# Altium PCB Copy of PCB1.PcbDoc (part 1 of 9)
Units mm, origin at the board's own origin, x right, y up, seen from the top; angles counter-clockwise.
Board outline 100 x 100 mm, 6 copper layers (Top Layer, Int1 (GND), Int2 (Sign), Int3 (Sign), Int4 (PWR), Bottom Layer), stack 1.538 mm thick; 614 components, 712 nets, 3013 pads, 501 vias.
Unrouted connection lines stored in the file: 259.
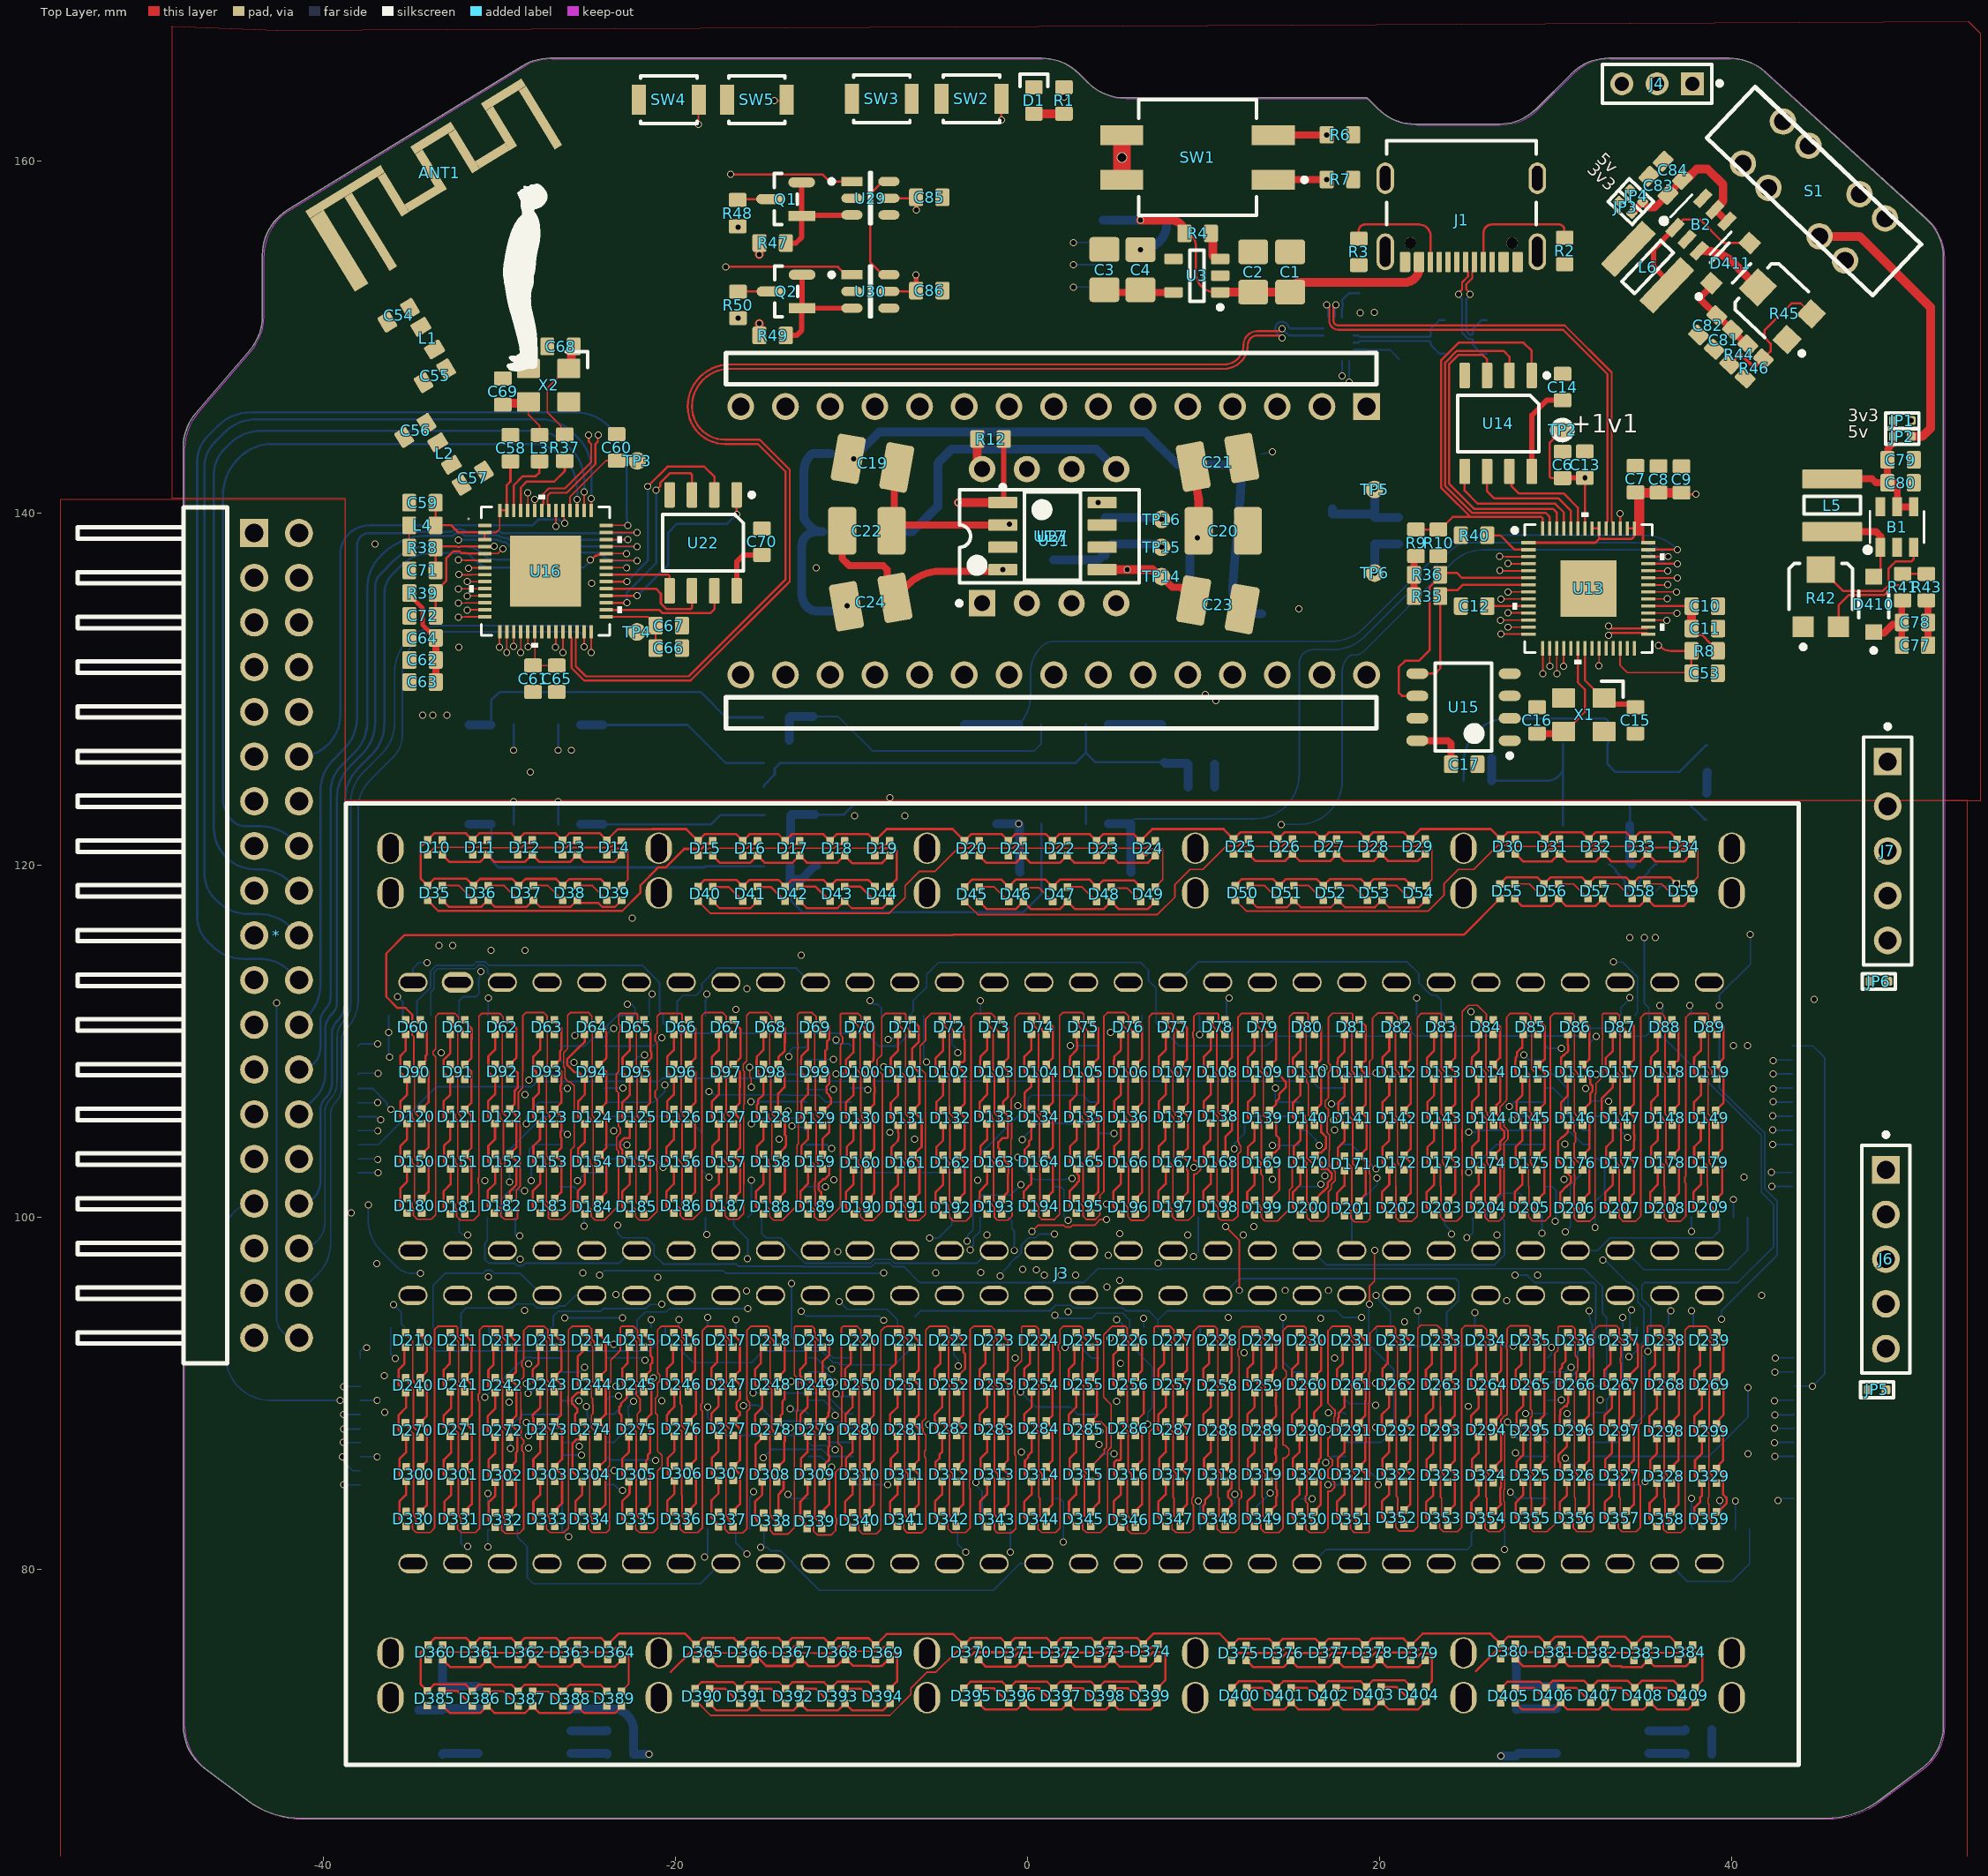
[diagram p0: Top Layer view]
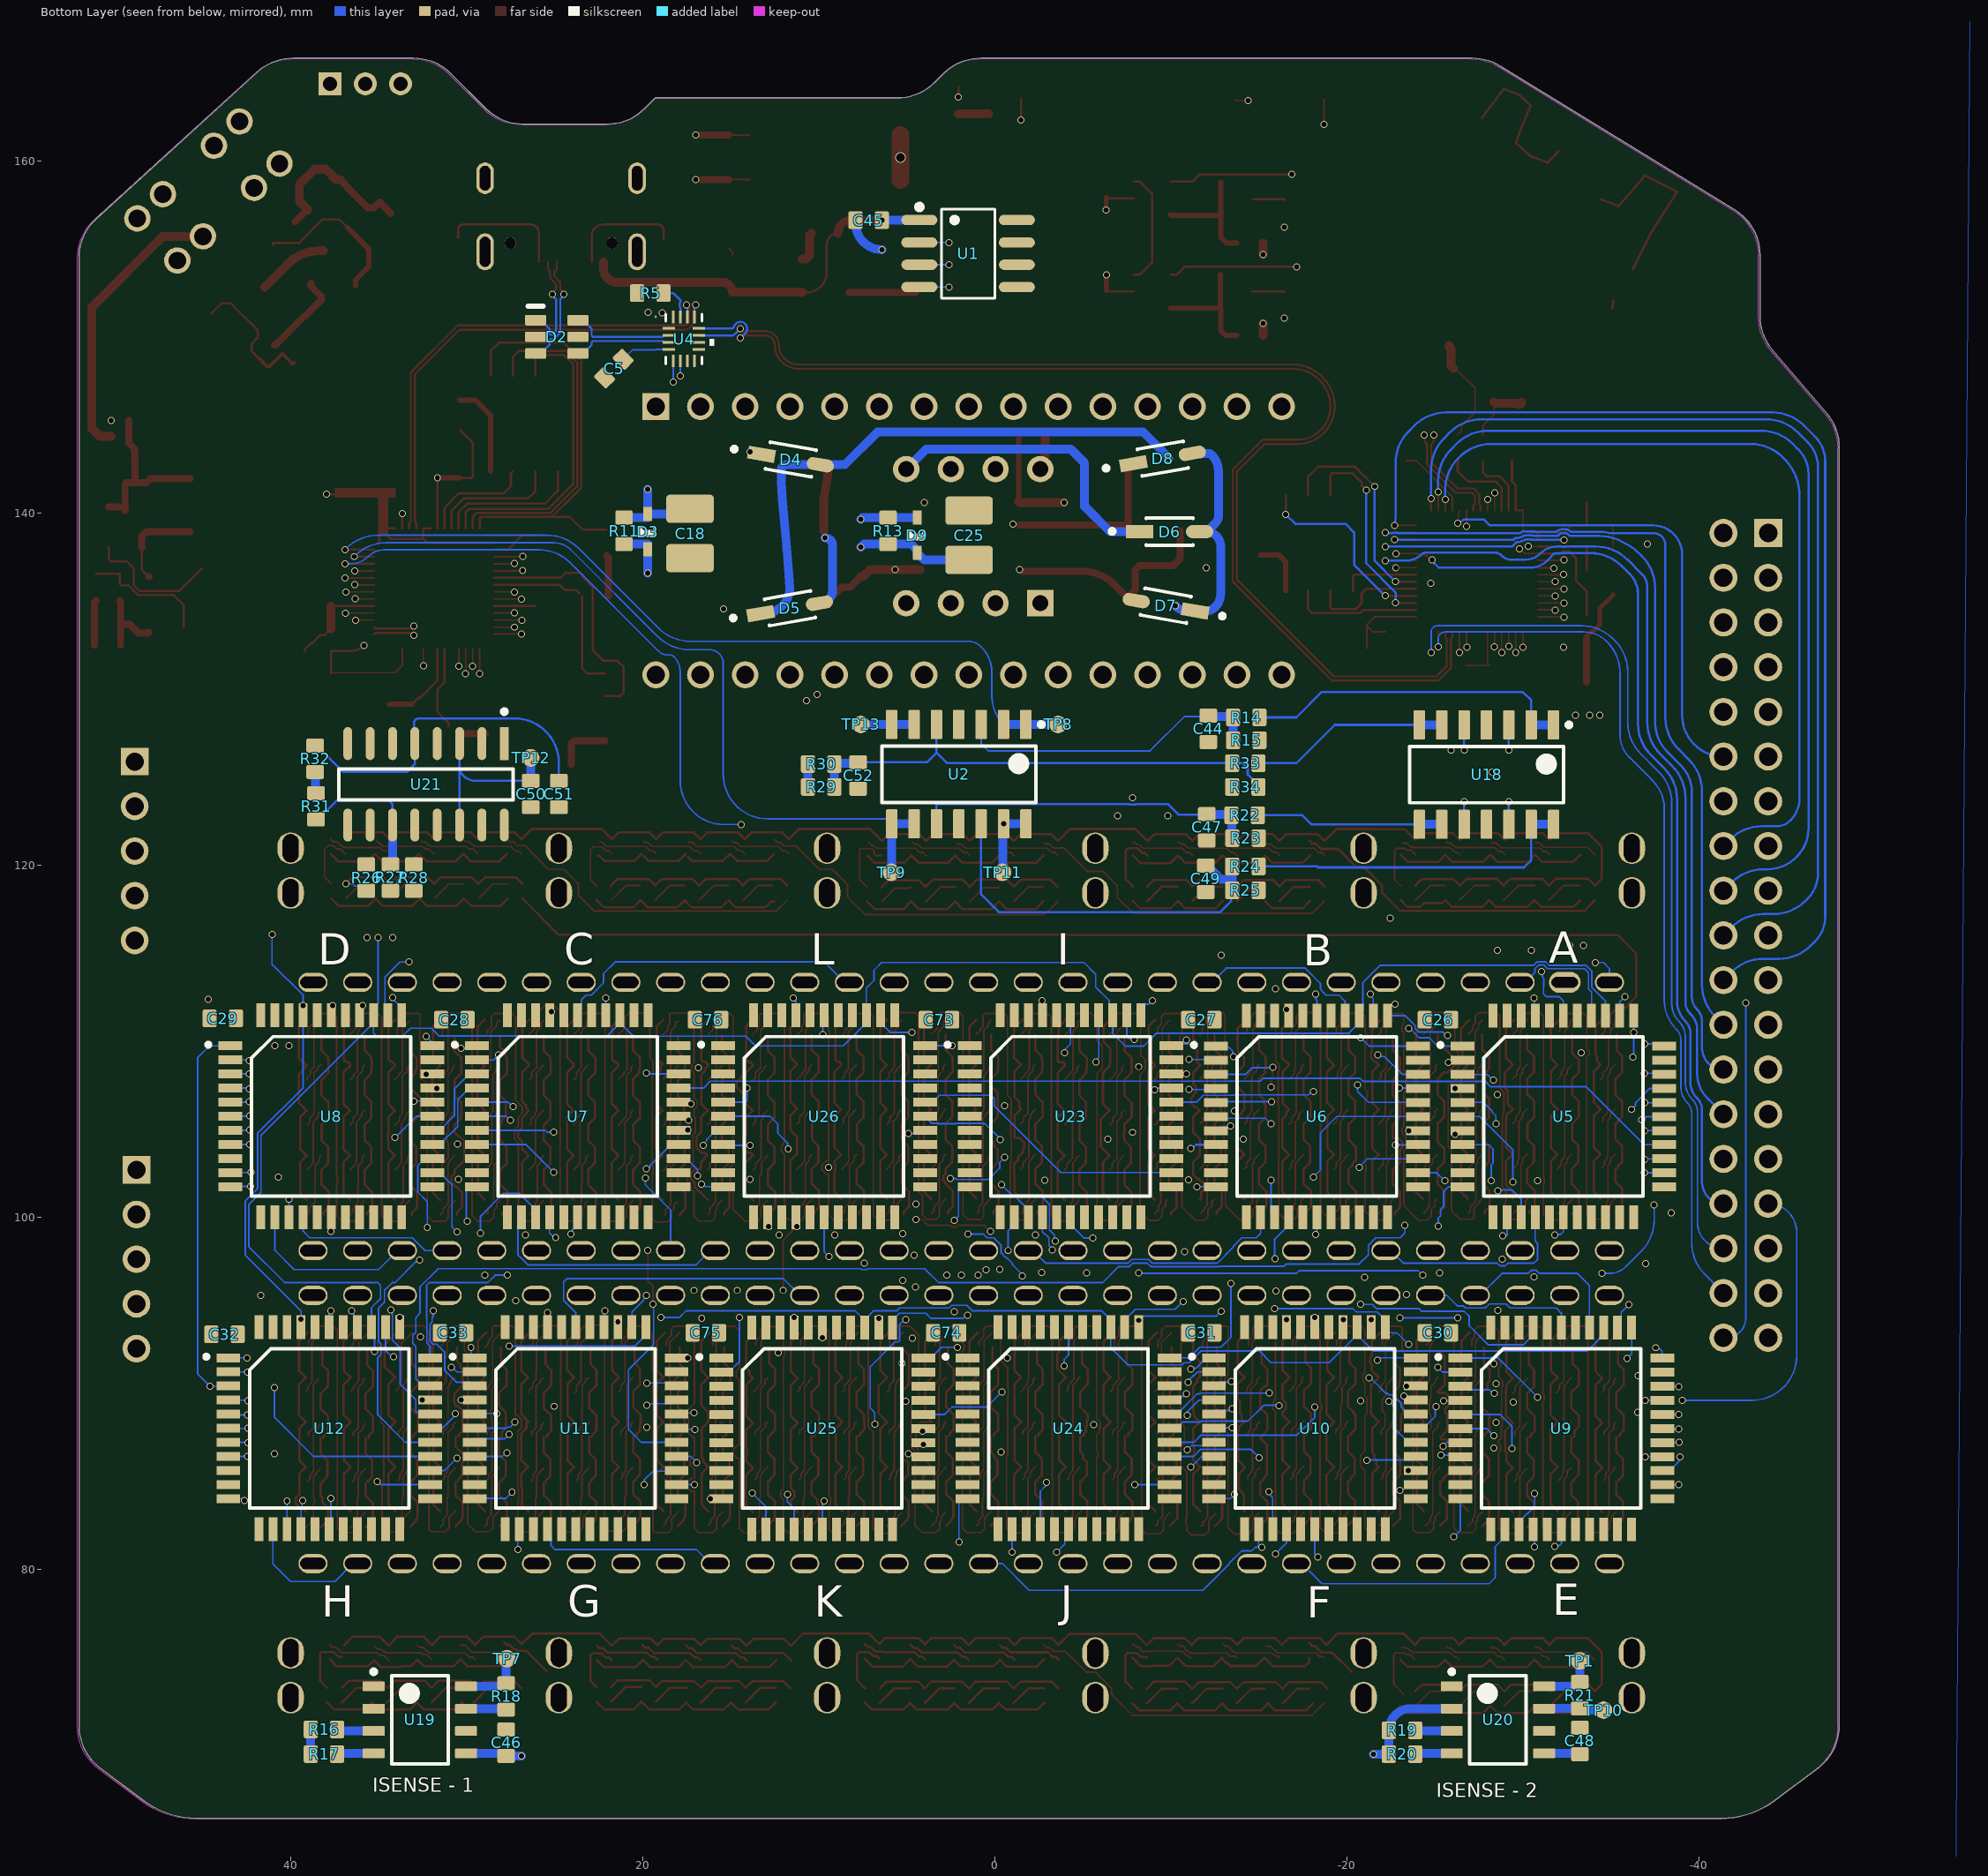
[diagram p1: Bottom Layer view, seen from below]
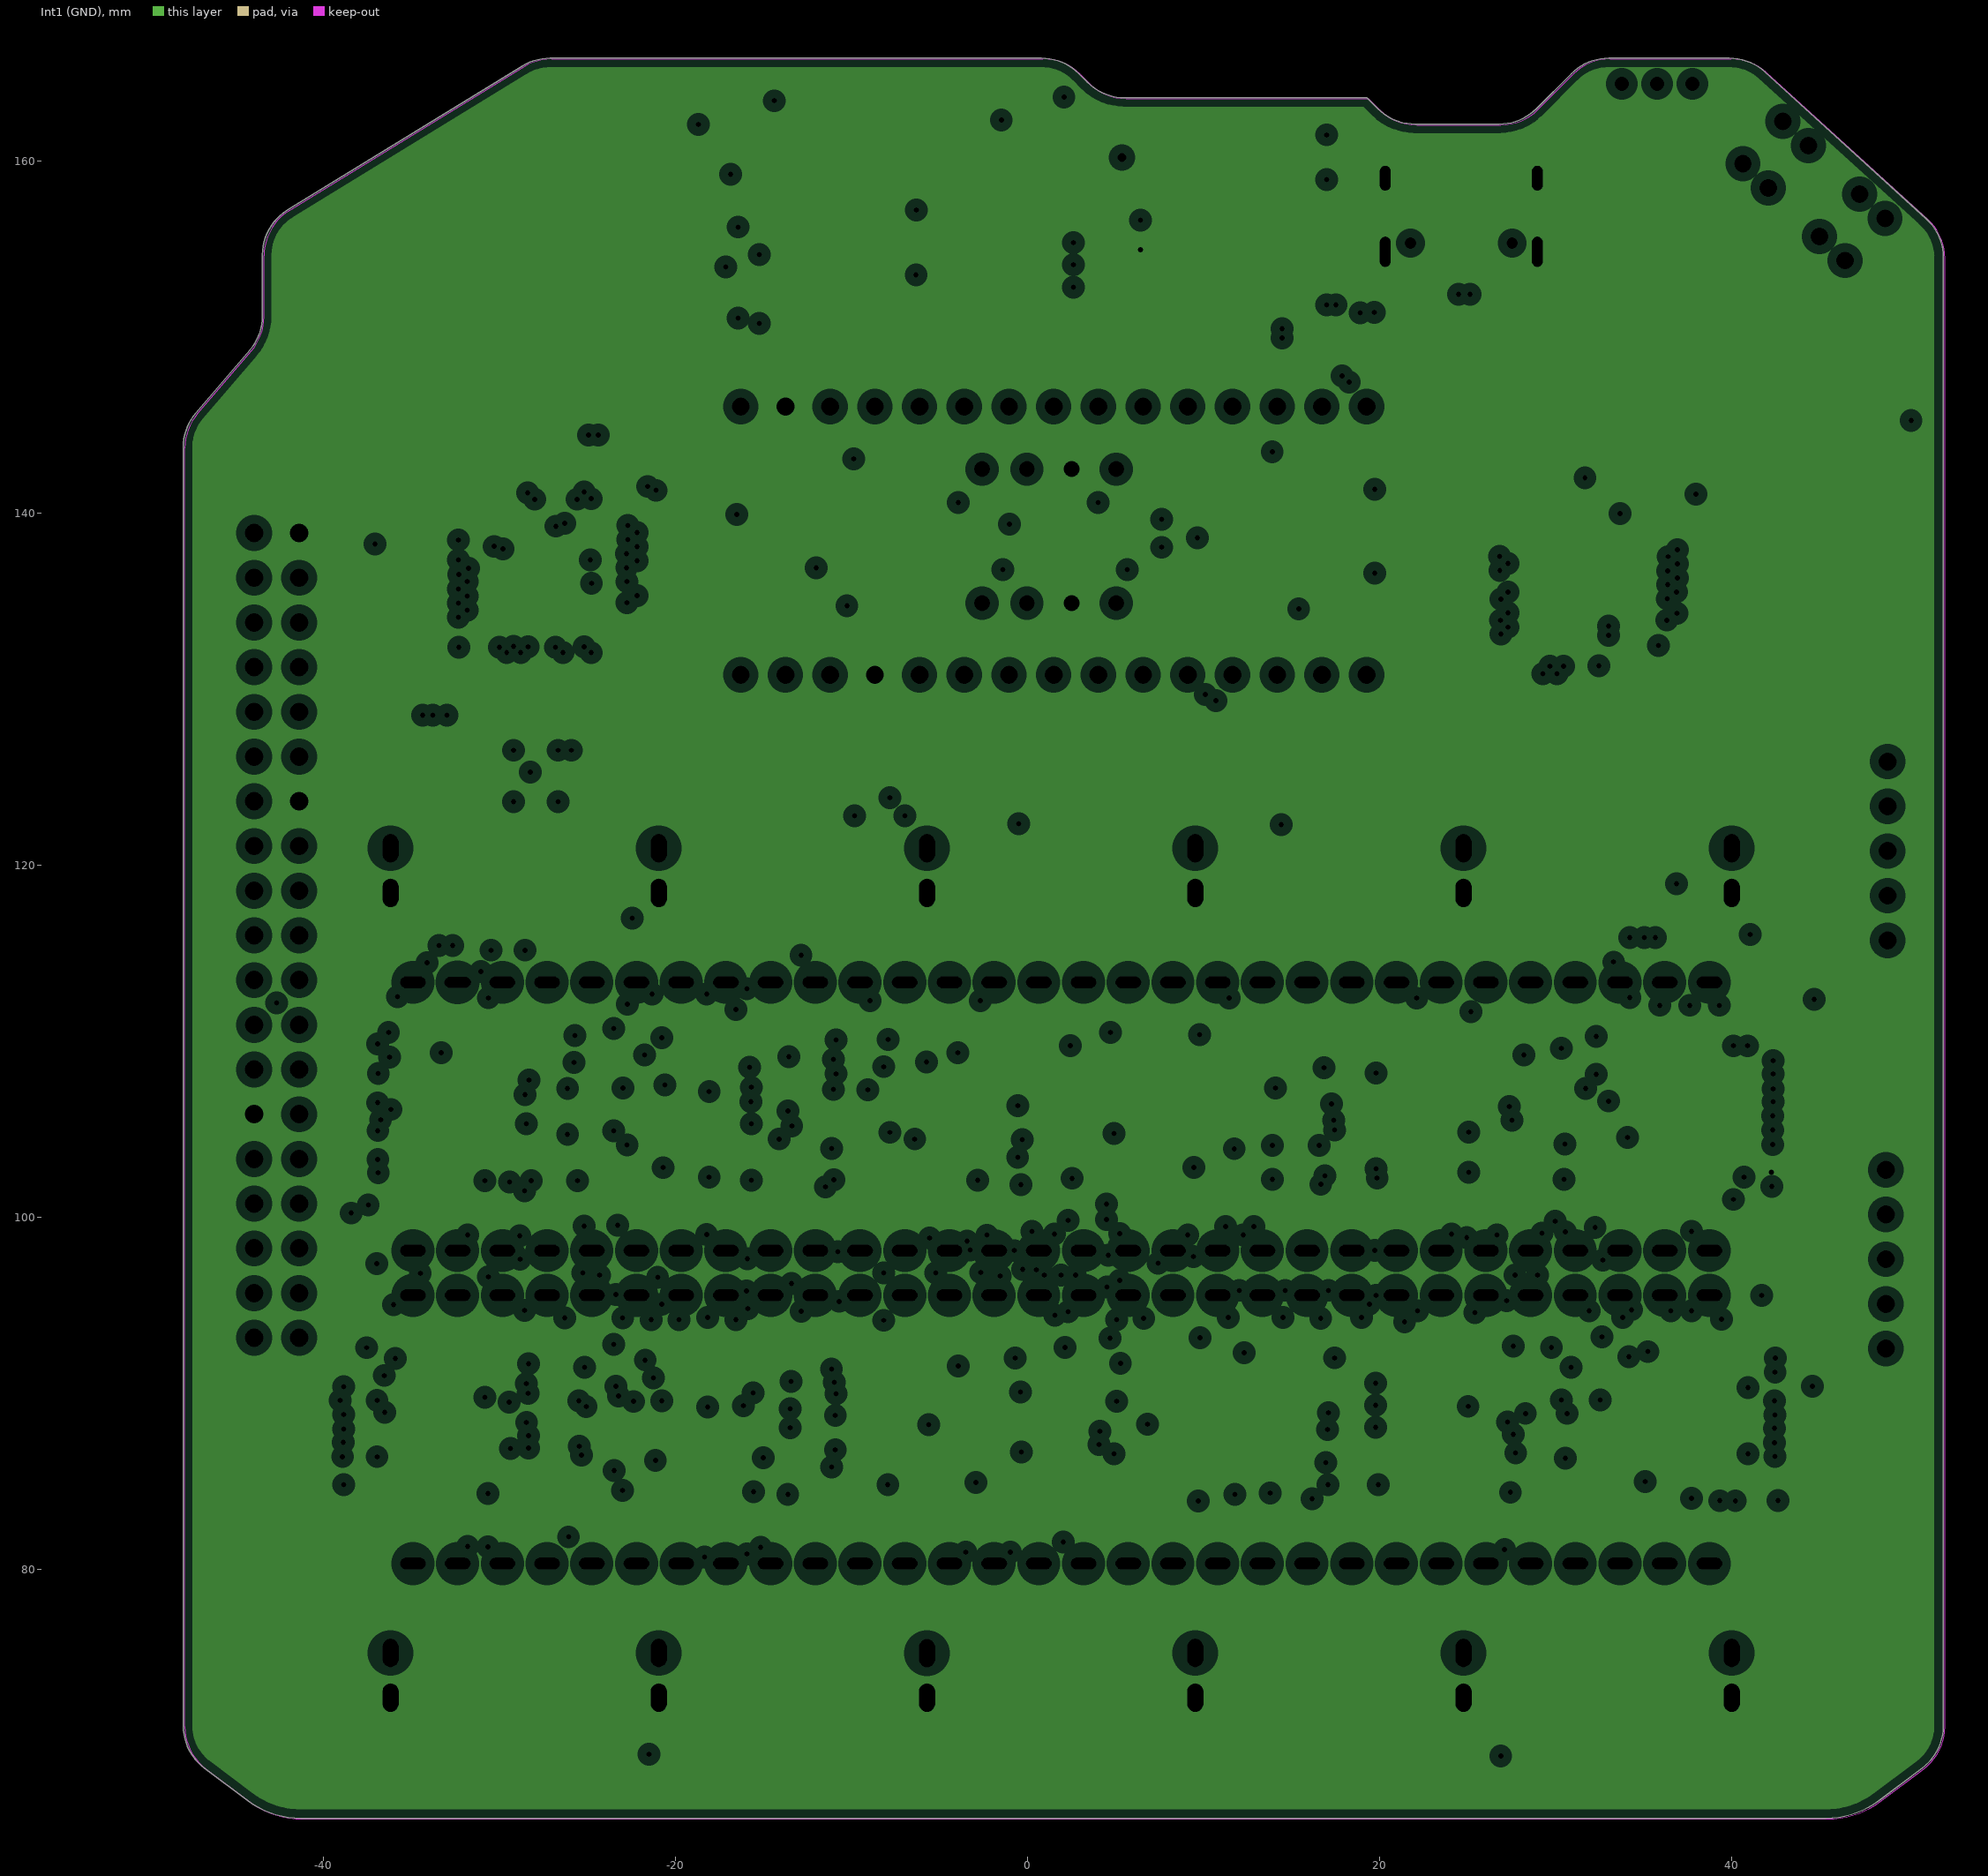
[diagram p2: Int1 (GND), clearances drawn from the general rule]
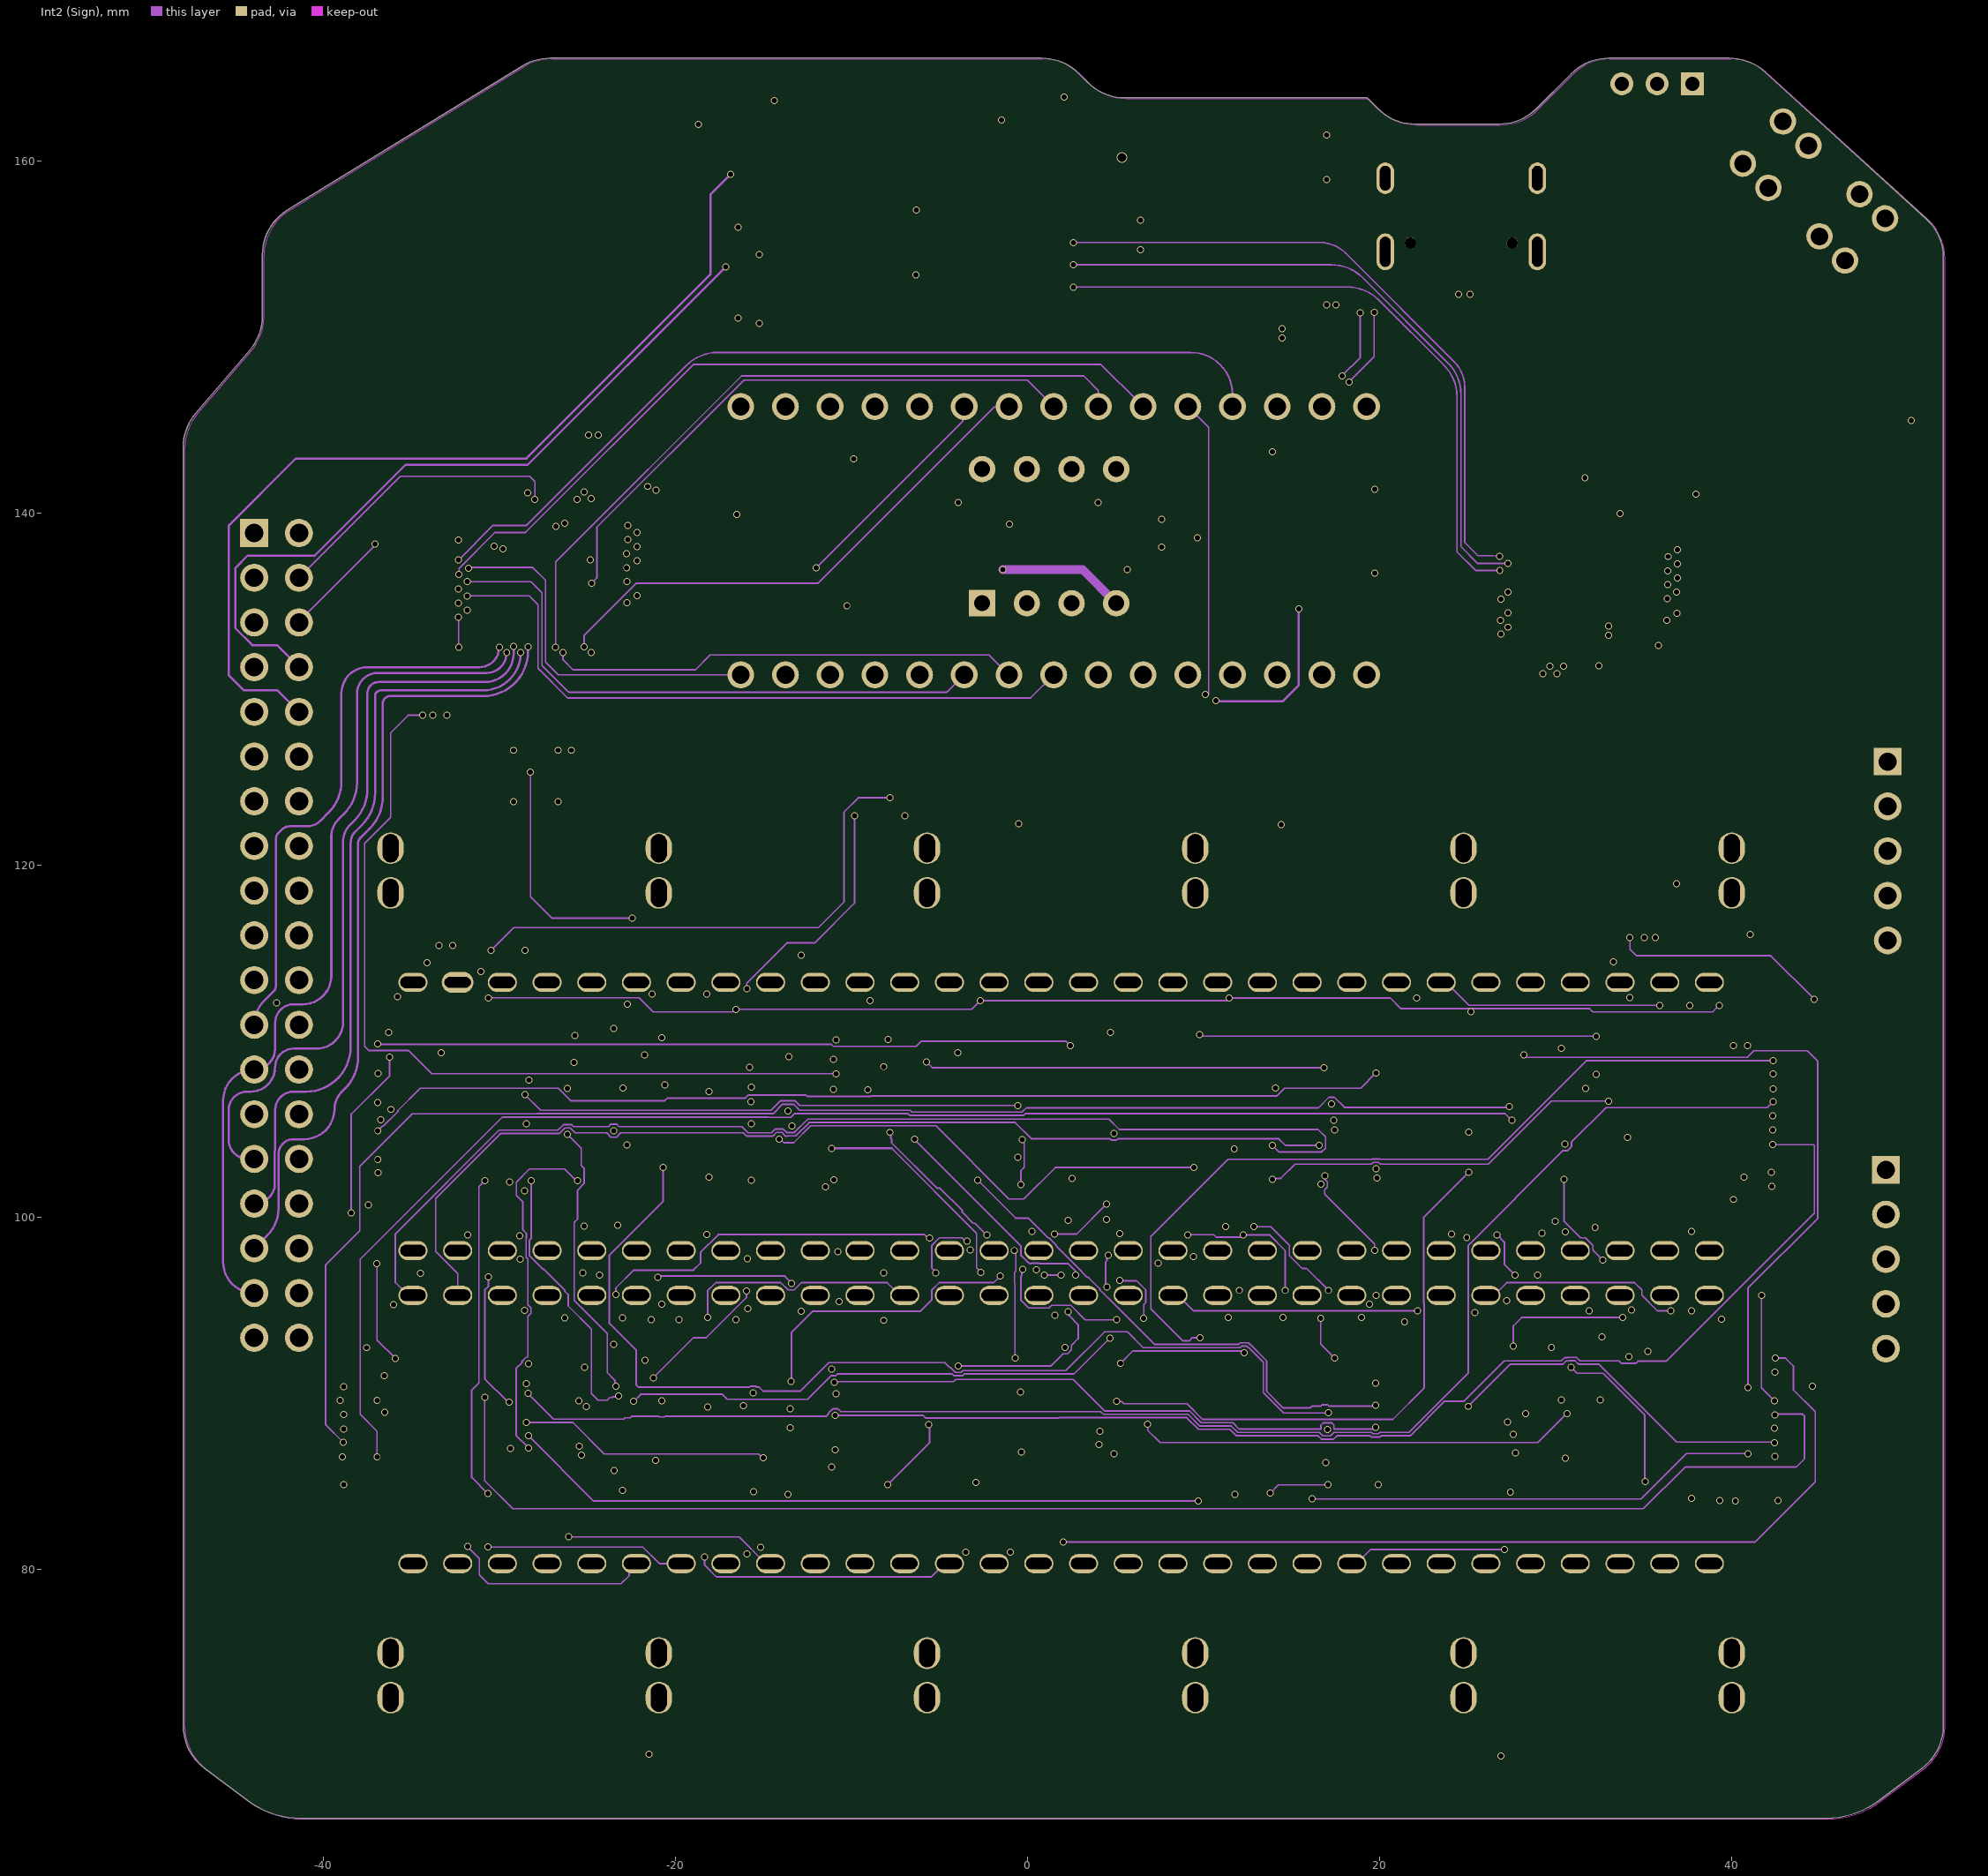
[diagram p3: Int2 (Sign)]
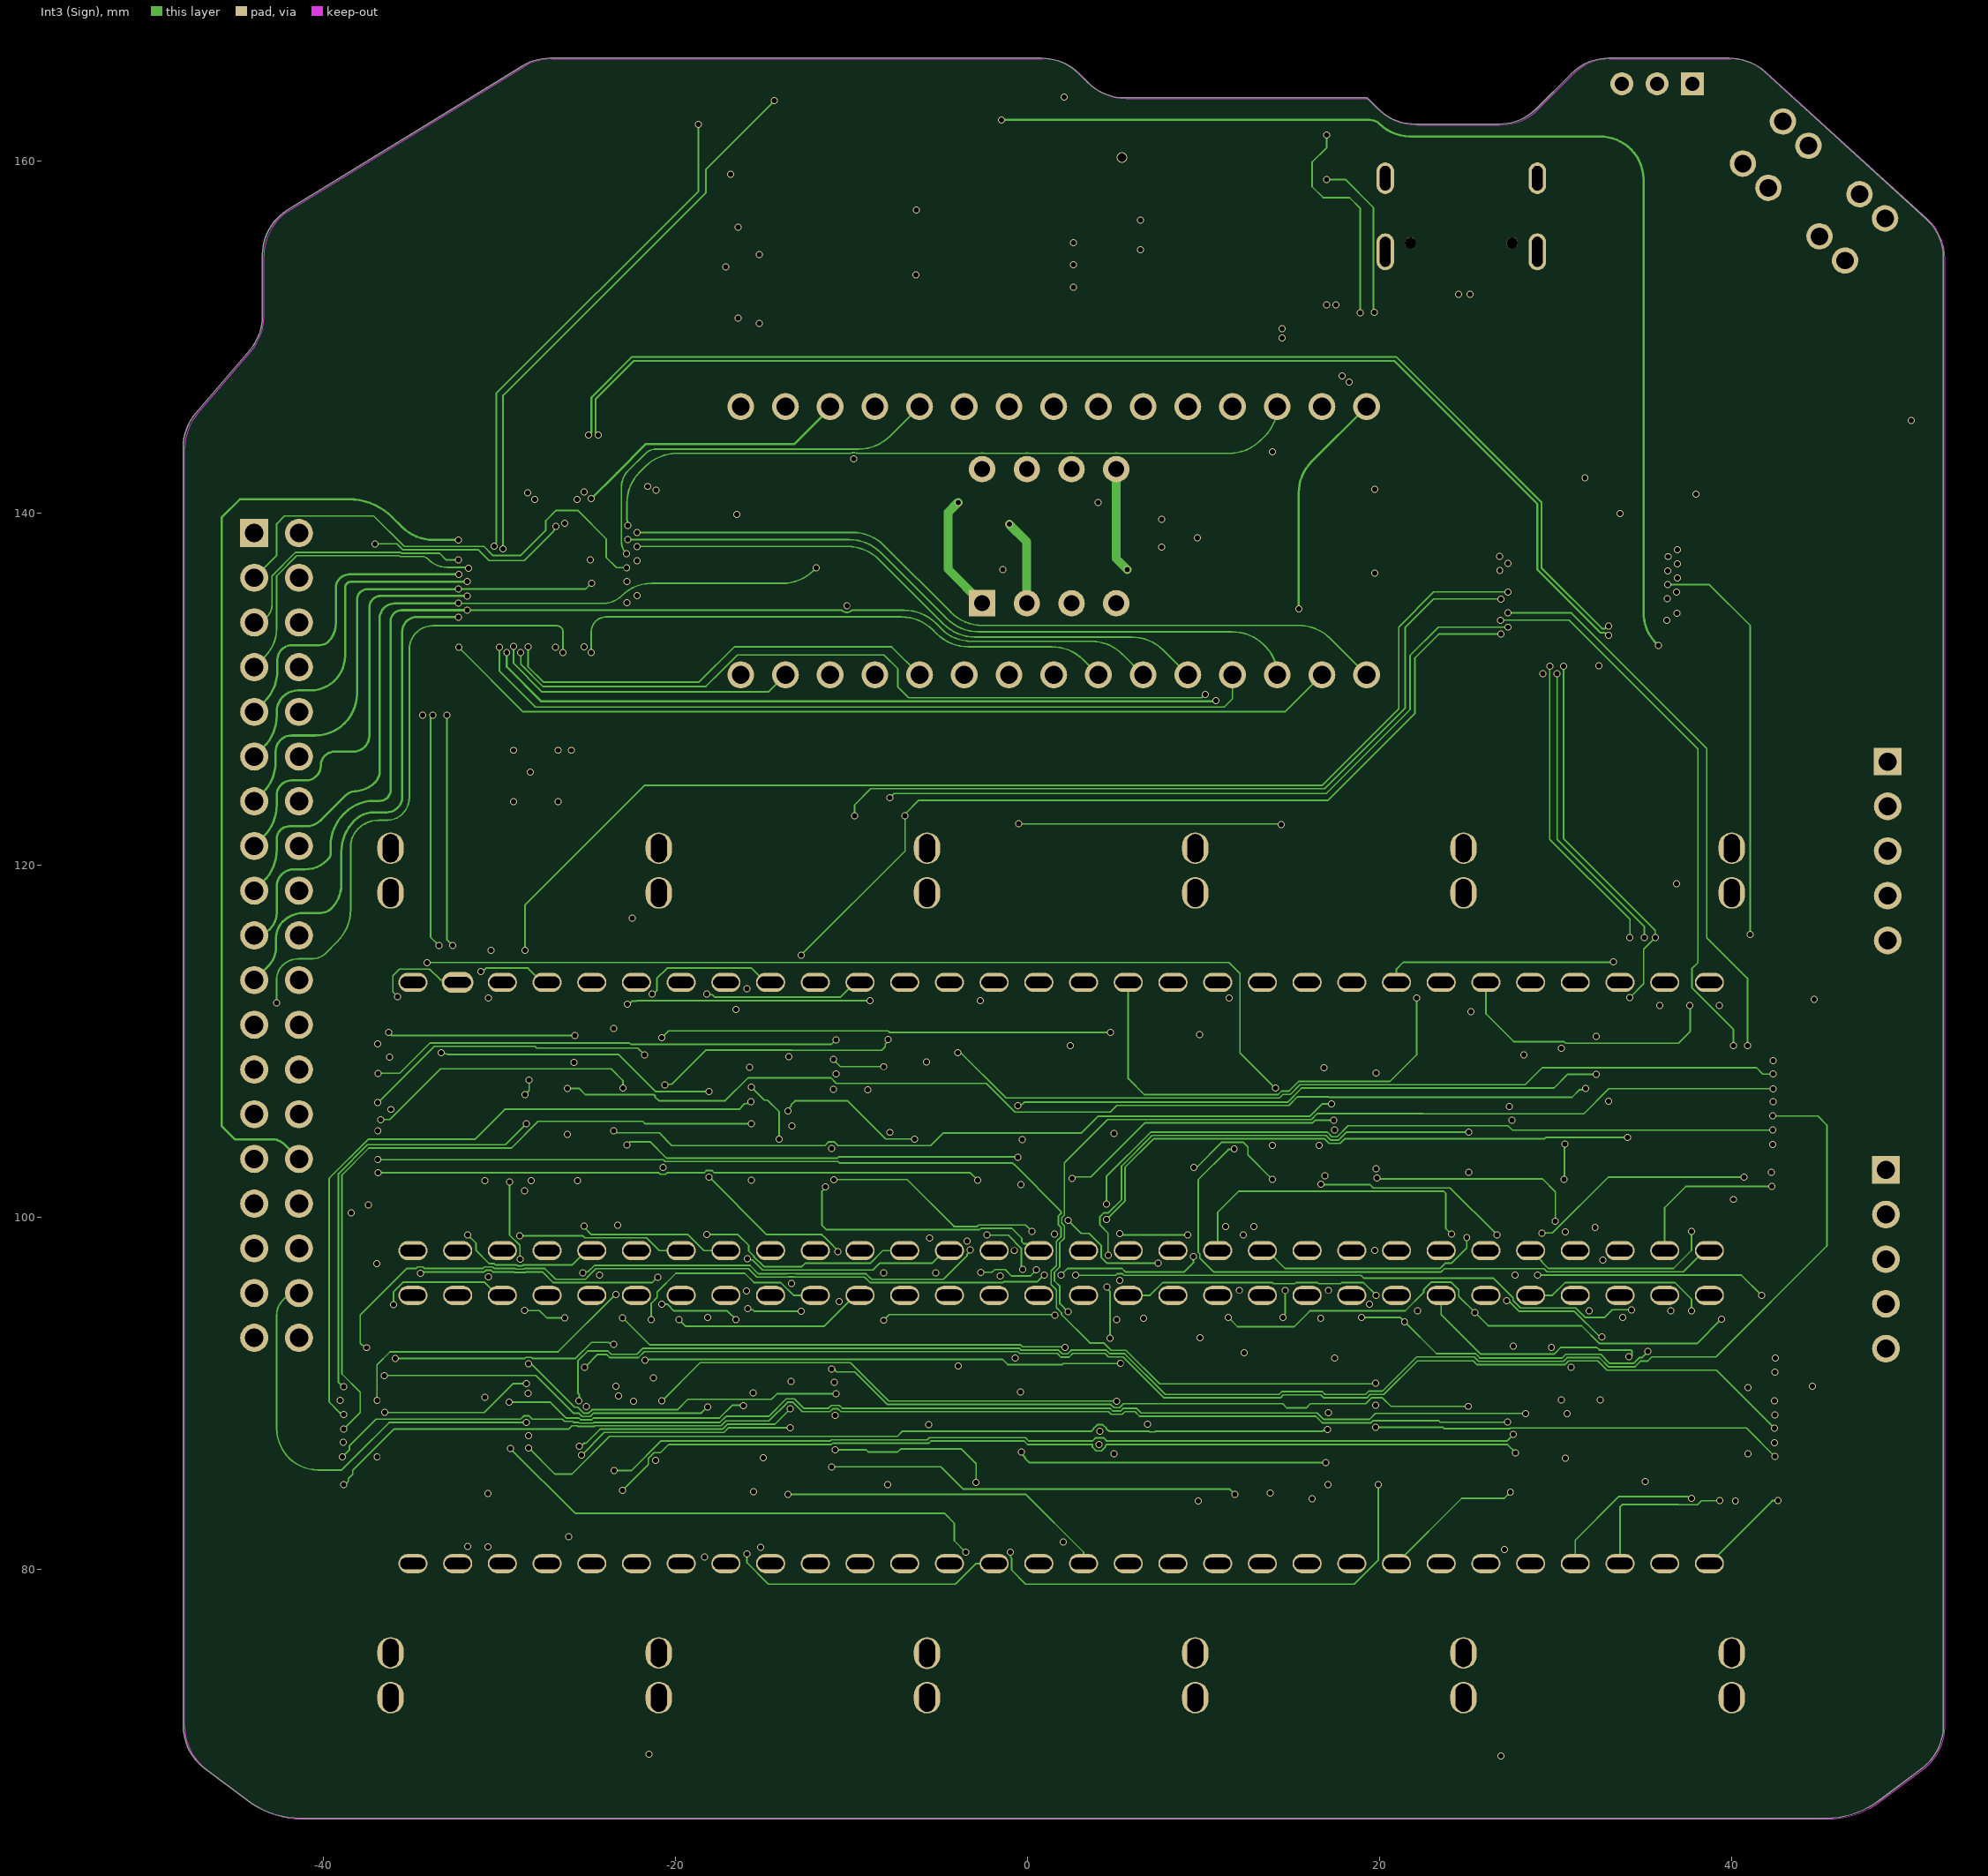
[diagram p4: Int3 (Sign)]
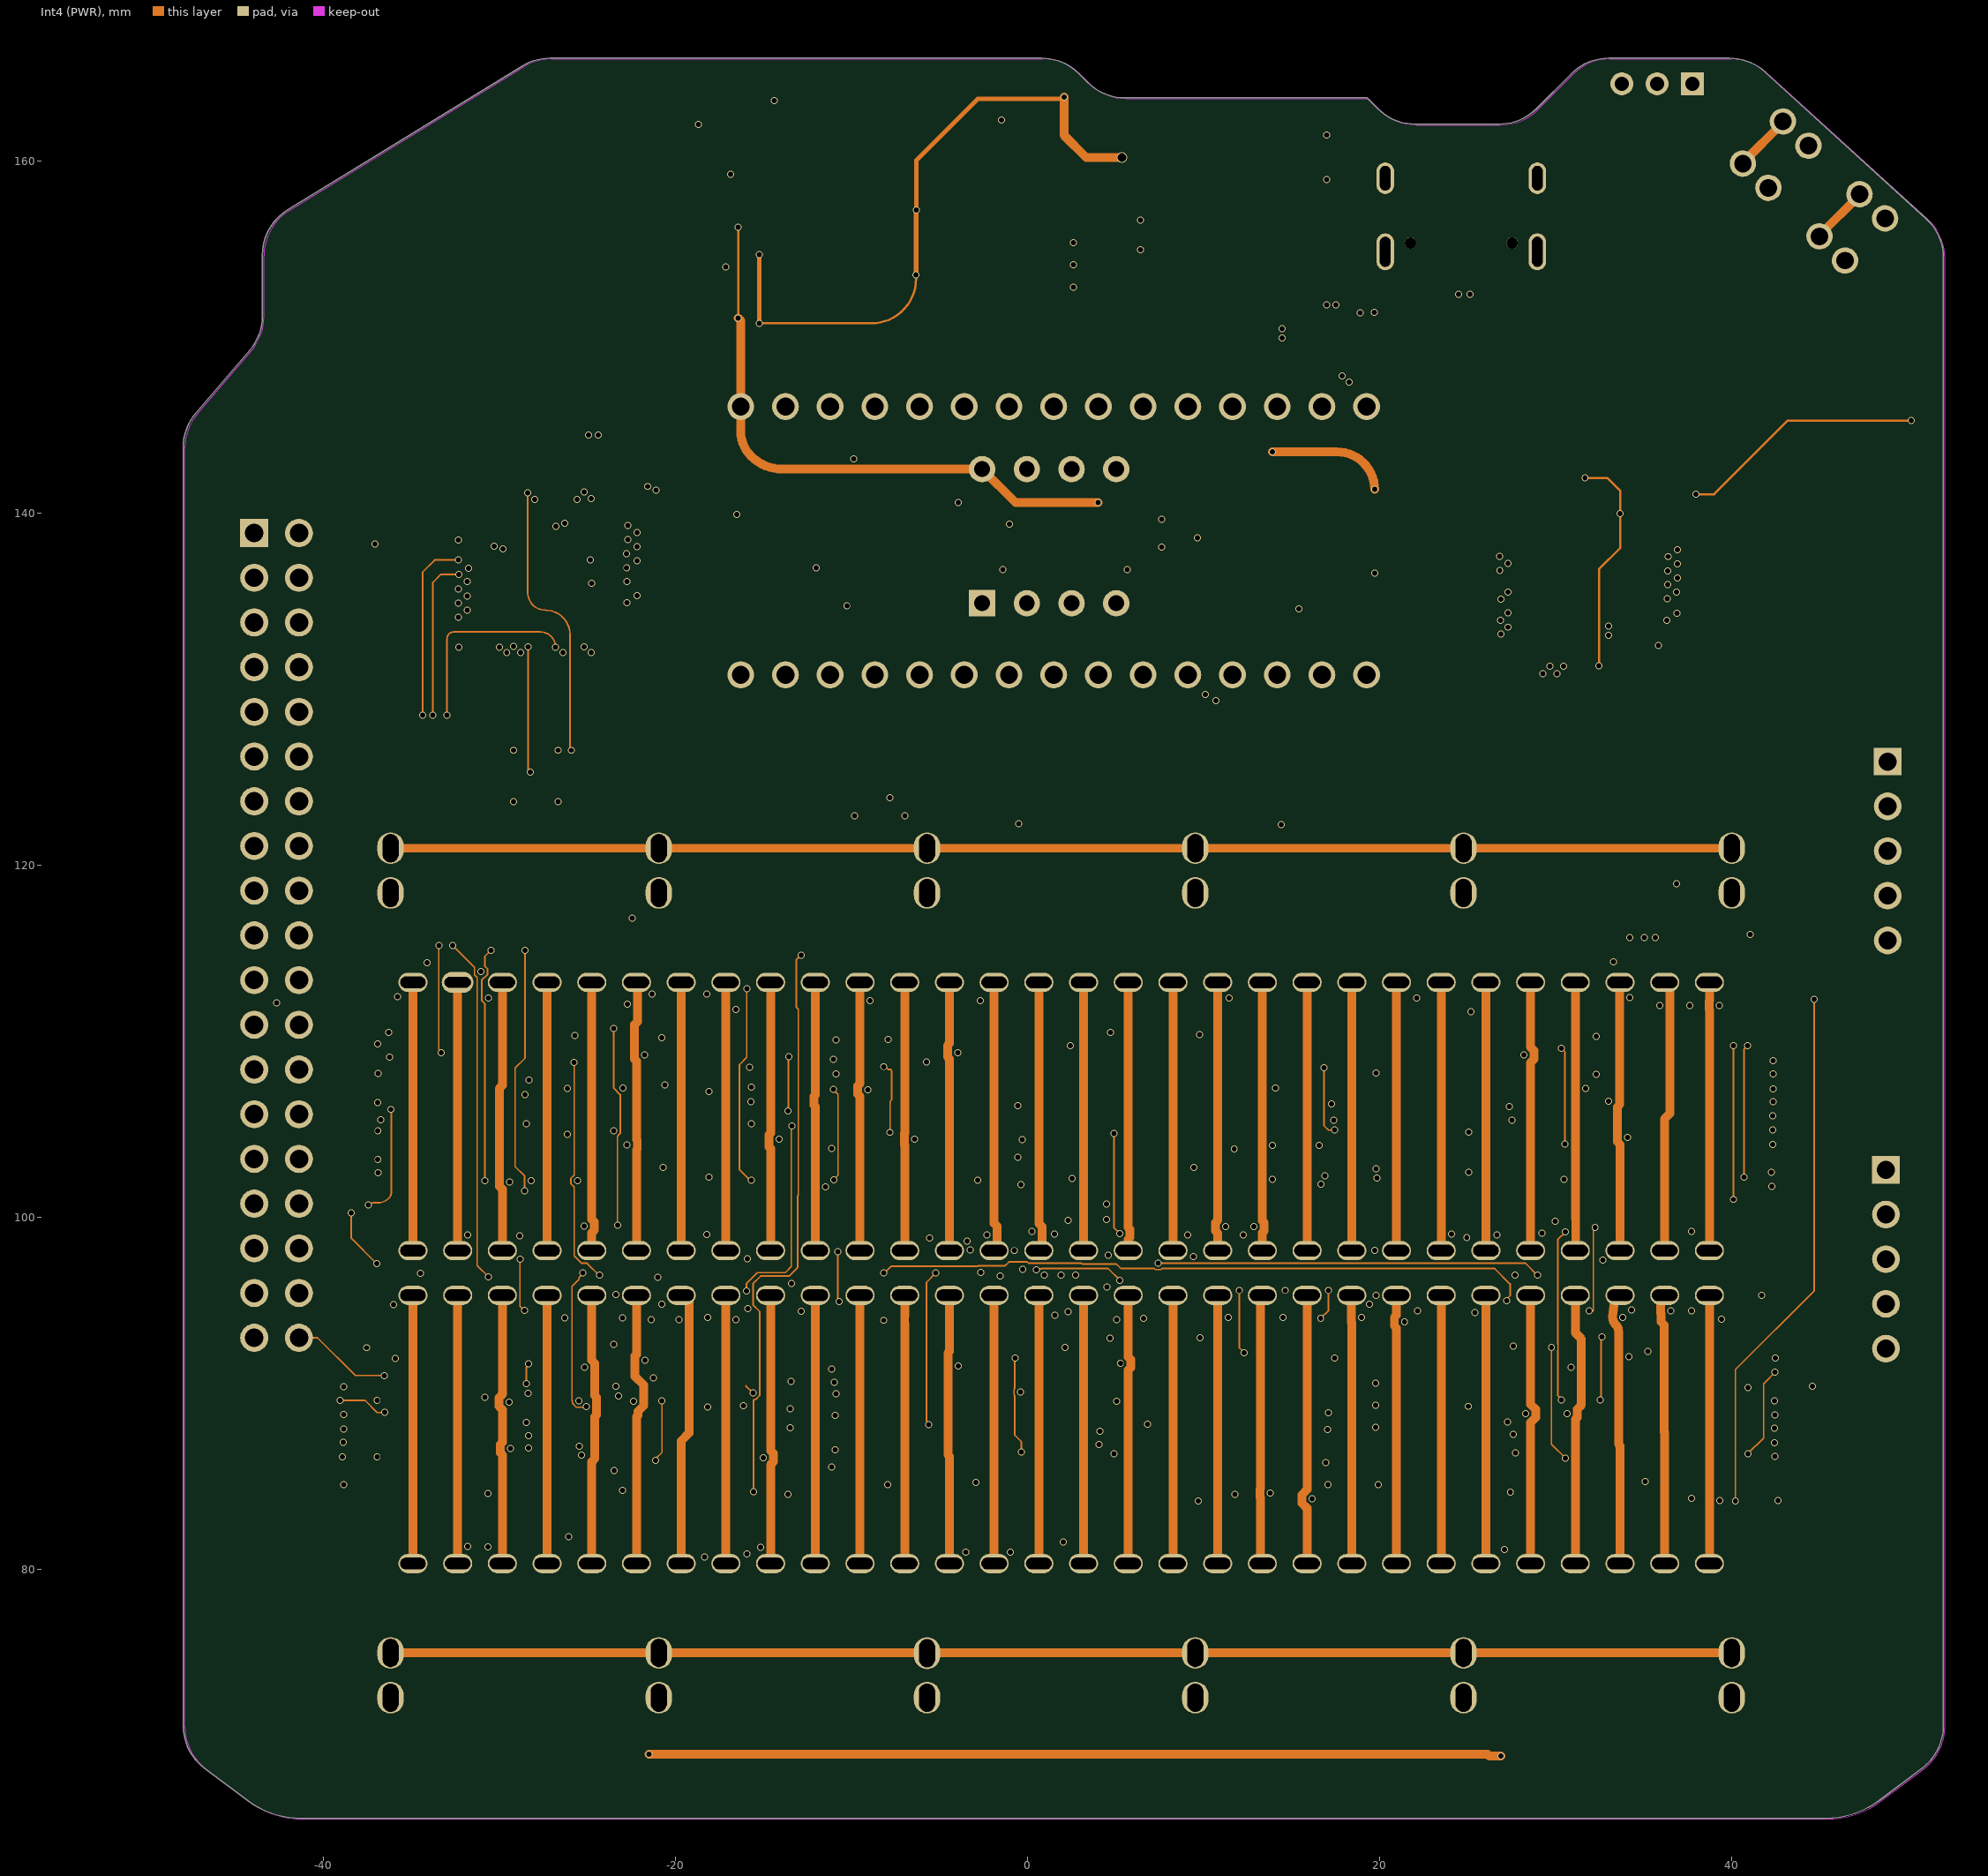
[diagram p5: Int4 (PWR)]

## Layer stack, top to bottom
Top Solder: solder mask 0.0254, SM-001, Dk 4
Top Layer: signal copper 0.035
Dielectric 1: prepreg 0.0994, PP-006, Dk 4.1
Int1 (GND): plane copper 0.0152, net REF
Dielectric 3: core 0.55, Core-035, Dk 4.7
Int2 (Sign): signal copper 0.0152
Dielectric 4: prepreg 0.1088, PP-006, Dk 4.1
Int3 (Sign): signal copper 0.0152
Dielectric 6: core 0.55, Core-035, Dk 4.7
Int4 (PWR): signal copper 0.0152
Dielectric 7: prepreg 0.0994, PP-006, Dk 4.1
Bottom Layer: signal copper 0.035
Bottom Solder: solder mask 0.0254, SM-001, Dk 4

## Board outline
-47.982,71.114 ccw(c-44.982,71.114) -46.782,68.714 -44.316,66.864 ccw(c-41.316,70.864) -41.316,65.864 45.351,65.864 ccw(c45.351,70.864) 48.351,66.864 50.818,68.714 ccw(c49.018,71.114) 52.018,71.114 52.018,154.531 ccw(c49.018,154.531) 51.036,156.75 41.876,165.083 ccw(c39.857,162.864) 39.857,165.864 33.01,165.864 ccw(c33.01,162.864) 30.889,164.985 28.896,162.993 cw(c26.775,165.114) 26.775,162.114 22.01,162.114 cw(c22.01,165.114) 19.889,162.993 19.268,163.614 5.51,163.614 cw(c5.51,166.614) 3.389,164.493 2.896,164.985 ccw(c0.775,162.864) 0.775,165.864 -27.136,165.864 ccw(c-27.136,162.864) -28.704,165.422 -42.05,157.242 ccw(c-40.482,154.684) -43.482,154.684 -43.482,151.224 cw(c-46.482,151.224) -44.205,149.272 -47.26,145.707 ccw(c-44.982,143.754) -47.982,143.754

## Design rules (kind name [scope] priority, off if disabled: settings)
Clearance [All] p1: gap=0.127 ignorepadtopadclearanceinfootprint=TRUE except(0.1: Arc-Arc Arc-Track Arc-SMDPad Track-Track Track-SMDPad)
Clearance Clearance_Track_via [isVia vs IsTrack] p2: gap=0.126 ignorepadtopadclearanceinfootprint=TRUE
ComponentClearance [All] p1 off: gap=0.254 collisioncheckmode=3 verticalgap=0.254 showdistances=FALSE
DiffPairsRouting [All] p1: maxlimit=0.127 minlimit=0.127 mostfreqgap=0.127 toplayer_maxgap=0.127 toplayer_prefgap=0.127 toplayer_minwidth=0.116 toplayer_maxwidth=0.116 toplayer_prefwidth=0.116 midlayer1_maxgap=0.127 midlayer1_prefgap=0.127 midlayer1_minwidth=0.105 midlayer1_maxwidth=0.105 midlayer1_prefwidth=0.105 midlayer2_maxgap=0.127 midlayer2_prefgap=0.127 midlayer2_minwidth=0.105 midlayer2_maxwidth=0.105 midlayer2_prefwidth=0.105 midlayer3_maxgap=0.127 midlayer3_prefgap=0.127 midlayer3_minwidth=0.1 midlayer3_maxwidth=0.1 midlayer3_prefwidth=0.1 bottomlayer_mingap=0.127 bottomlayer_minwidth=0.116 bottomlayer_maxwidth=0.116 bottomlayer_prefwidth=0.116 impedanceprofiledriven=TRUE impedanceprofileid={9293EFB6-438F-4DA0-987A-D6DBB3EA7974} impedanceprofilevalue=90.000000 maxuncoupledlength=12.7
HoleToHoleClearance HoleToHoleClearance_1 [IsVia vs IsVia] p1: gap=0.126 allowstackedmicrovias=TRUE
HoleToHoleClearance [All] p2: gap=0.254 allowstackedmicrovias=TRUE
PlaneClearance PlaneClearance_1_via [IsVia] p1: clearance=0.4
PlaneClearance [All] p2: clearance=0.5
PlaneConnect [All] p1: pad.planeconnectstyle=Relief pad.reliefexpansion=0.508 pad.reliefentries=4 pad.reliefconductorwidth=0.254 pad.reliefairgap=0.254 via.planeconnectstyle=Direct via.reliefexpansion=0.508 via.reliefentries=4 via.reliefconductorwidth=0.254 via.reliefairgap=0.254
PolygonConnect [All] p1: thpad.connectstyle=Relief thpad.reliefconductorwidth=0.254 thpad.reliefentries=4 thpad.polygonreliefangle="90 Angle" thpad.airgapwidth=0.2 smdpad.connectstyle=Relief smdpad.reliefconductorwidth=0.254 smdpad.reliefentries=4 smdpad.polygonreliefangle="90 Angle" smdpad.airgapwidth=0.2 via.connectstyle=Direct via.reliefconductorwidth=0.254 via.reliefentries=4 via.polygonreliefangle="90 Angle" via.airgapwidth=0.254
RoutingVias [All] p1: holewidth=0.3 width=0.4 viastyle="Through Hole" minholewidth=0.3 minwidth=0.4 maxholewidth=0.5 maxwidth=0.6
SilkToSilkClearance [All] p1: silktosilkclearance=0
SolderMaskExpansion SolderMaskExpansion_via [IsVia] p1: expansion=0.102 istentingtop=FALSE soldermaskfromhole=TRUE
SolderMaskExpansion SolderMaskExpansion_1 [All] p2: expansion=0.102 istentingtop=FALSE
SupplyNets "Schematic Supply Nets_11" [InNet('CH446_VEE')] p1: voltage=0.000
SupplyNets "Schematic Supply Nets_10" [InNet('BUCK1_3v3')] p2: voltage=0.000
SupplyNets "Schematic Supply Nets_9" [InNet('+8V')] p3: voltage=0.000
SupplyNets "Schematic Supply Nets_8" [InNet('CH446_VDD')] p4: voltage=0.000
SupplyNets "Schematic Supply Nets_7" [InNet('+OSCV')] p5: voltage=0.000
SupplyNets "Schematic Supply Nets_5" [InNet('REF')] p6: voltage=0.000
SupplyNets "Schematic Supply Nets_3" [InNet('-8V')] p7: voltage=0.000
SupplyNets "Schematic Supply Nets_2" [InNet('+1V1')] p8: voltage=0.000
SupplyNets "Schematic Supply Nets_1" [InNet('+FUNV')] p9: voltage=0.000
SupplyNets "Schematic Supply Nets" [InNet('ANALOG_5V')] p10: voltage=0.000
UnRoutedNet [All] p1: checkbadconnections=TRUE
ViasUnderSMD [All] p1: allowed=TRUE
Width Width_Set2 [All] p1: maxlimit=0.5 minlimit=0.09 preferedwidth=0.127
Width Width_Set_2 [All] p2: maxlimit=0.155 minlimit=0.127 preferedwidth=0.155 toplayer_minwidth=0.155 midlayer1_minwidth=0.139 midlayer1_maxwidth=0.139 midlayer1_prefwidth=0.139 midlayer2_minwidth=0.139 midlayer2_maxwidth=0.139 midlayer2_prefwidth=0.139 midlayer3_maxwidth=0.127 midlayer3_prefwidth=0.127 bottomlayer_minwidth=0.155 minimp=50.000000 maximp=50.000000 favimp=50.000000
23 further rules are at their usual default settings.

## Classes and differential pairs
component class RP2040: C6 C7 C8 C9 C10 C11 C12 C13 C14 C15 C16 C17 C53 R8 R9 R10 R35 R36 R40 SW2 SW3 TP2 U13 U14 U15 X1
component class Nano_HEADER: U31
component class MATRIX: C26 C27 C28 C29 C30 C31 C32 C33 U5 U6 U7 U8 U9 U10 U11 U12
component class ESP32_Dev: *
component class DOUBLER: C18 C19 C20 C21 C22 C23 C24 C25 D3 D4 D5 D6 D7 D8 D9 R11 R12 R13 TP5 TP6 TP14 TP15 TP16 U17 U27
component class Designator: C85 C86 Q1 Q2 R47 R48 R49 R50 U29 U30
component class CONTROL_CROSSPOINTS: C73 C74 C75 C76 U23 U24 U25 U26
component class BREADBOARD: H J3
component class BOOST_CONVERTER: B1 B2 C77 C78 C79 C80 C81 C82 C83 C84 D410 D411 JP1 JP2 JP3 JP4 L5 L6 R41 R42 R43 R44 R45 R46
component class ANALOG: C44 C45 C46 C47 C48 C49 C50 C51 C52 R14 R15 R16 R17 R18 R19 R20 R21 R22 R23 R24 R25 R26 R27 R28 R29 R30 R31 R32 R33 R34 TP1 TP7 TP8 TP9 TP10 TP11 TP12 TP13 U1 U2 U18 U19 U20 U21
component class WS2812_ARRAY: D10 D11 D12 D13 D14 D15 D16 D17 D18 D19 D20 D21 D22 D23 D24 D25 D26 D27 D28 D29 D30 D31 D32 D33 D34 D35 D36 D37 D38 D39 D40 D41 D42 D43 D44 D45 D46 D47 D48 D49 D50 D51 D52 D53 D54 D55 D56 D57 D58 D59 D60 D61 D62 D63 D64 D65 D66 D67 D68 D69 D70 D71 D72 D73 D74 D75 D76 D77 D78 D79 D80 D81 D82 D83 D84 D85 D86 D87 D88 D89 D90 D91 D92 D93 D94 D95 D96 D97 D98 D99 D100 D101 D102 D103 D104 D105 D106 D107 D108 D109 D110 D111 D112 D113 D114 D115 D116 D117 D118 D119 D120 D121 D122 D123 D124 D125 D126 D127 D128 D129 D130 D131 D132 D133 D134 D135 D136 D137 D138 D139 D140 D141 D142 D143 D144 D145 D146 D147 D148 D149 D150 D151 D152 D153 D154 D155 D156 D157 D158 D159 D160 D161 D162 D163 D164 D165 D166 D167 D168 D169 D170 D171 D172 D173 D174 D175 D176 D177 D178 D179 D180 D181 D182 D183 D184 D185 D186 D187 D188 D189 D190 D191 D192 D193 D194 D195 D196 D197 D198 D199 D200 D201 D202 D203 D204 D205 D206 D207 D208 D209 D210 D211 D212 D213 D214 D215 D216 D217 D218 D219 D220 D221 D222 D223 D224 D225 D226 D227 D228 D229 D230 D231 D232 D233 D234 D235 D236 D237 D238 D239 D240 D241 D242 D243 D244 D245 D246 D247 D248 D249 D250 D251 D252 D253 D254 D255 D256 D257 D258 D259 D260 D261 D262 D263 D264 D265 D266 D267 D268 D269 D270 D271 D272 D273 D274 D275 D276 D277 D278 D279 D280 D281 D282 D283 D284 D285 D286 D287 D288 D289 D290 D291 D292 D293 D294 D295 D296 D297 D298 D299 D300 D301 D302 D303 D304 D305 D306 D307 D308 D309 D310 D311 D312 D313 D314 D315 D316 D317 D318 D319 D320 D321 D322 D323 D324 D325 D326 D327 D328 D329 D330 D331 D332 D333 D334 D335 D336 D337 D338 D339 D340 D341 D342 D343 D344 D345 D346 D347 D348 D349 D350 D351 D352 D353 D354 D355 D356 D357 D358 D359 D360 D361 D362 D363 D364 D365 D366 D367 D368 D369 D370 D371 D372 D373 D374 D375 D376 D377 D378 D379 D380 D381 D382 D383 D384 D385 D386 D387 D388 D389 D390 D391 D392 D393 D394 D395 D396 D397 D398 D399 D400 D401 D402 D403 D404 D405 D406 D407 D408 D409
component class MUX: C5 D2 R5 R6 R7 SW1 U4
component class Main: C1 C2 C3 C4 D1 J1 J4 J6 J7 JP5 JP6 R1 R2 R3 R4 S1 U3
component class ESP32_MINI: ANT1 C54 C55 C56 C57 C58 C59 C60 C61 C62 C63 C64 C65 C66 C67 C68 C69 C70 C71 C72 L1 L2 L3 L4 R37 R38 R39 SW4 SW5 TP3 TP4 U22 X2
differential pair ESP32-RP2040_UART: +ESP32_Rx_1 -ESP32_Tx_1
differential pair USB_1: +USB_1_P -USB_1_N
differential pair RP_1: +RP_1_P -RP_1_N
differential pair ESP_1: +ESP_1_P -ESP_1_N

## Components (designator, comment, footprint, x,y, rotation, side; value= is the part's Value field where it differs from the comment)
* "PZ254-2-19-W-2.5-G1" HDR-TH_38P-P2.54-H-M-R2-C19-S2.54 -42.679,116.023 r270 top
ANT1 "PCB Antenna 2.4GHz 50Ohm" ANT_IFA_USB_2_4GHZ_50R -37.84,152.816 r31.5 top
B1 "SX1308" SOT-23-6_L2.9-W1.6-P0.95-LS2.8-BL 49.39,139.225 r0 top
B2 "SX1308" SOT-23-6_L2.9-W1.6-P0.95-LS2.8-BL 38.248,156.412 r316.5 top
C1 "100n" CAP_0805 14.905,153.715 r270 top
C2 "10u" CAP_0805 12.805,153.715 r270 top
C3 "10u" CAP_0805 4.355,153.851 r270 top
C4 "100n" CAP_0805 6.405,153.844 r270 top
C5 "100nF" CAP_0603 21.632,148.227 r135 bottom
C6 "1U" CAP_0603 30.381,142.755 r270 top
C7 "2u2" CAP_0603 34.524,141.946 r270 top
C8 "2u2" CAP_0603 35.835,141.934 r270 top
C9 "2u2" CAP_0603 37.142,141.929 r270 top
C10 "2u2" CAP_0603 38.468,134.728 r180 top
C11 "2u2" CAP_0603 38.468,133.458 r180 top
C12 "100n" CAP_0603 25.359,134.735 r0 top
C13 "1U" CAP_0603 31.651,142.767 r270 top
C14 "100n" CAP_0603 30.381,147.175 r270 top
C15 "2u2" CAP_0603 34.524,128.242 r90 top
C16 "2u2" CAP_0603 28.936,128.242 r270 top
C17 "100n" CAP_0603 24.795,125.745 r180 top
C18 "100u" CAP_1210 17.305,138.858 r90 bottom
C19 "10u" CAP_1210 -8.824,142.851 r170 top
C20 "10u" CAP_1210 11.105,139.008 r180 top
C21 "10u" CAP_1210 10.783,142.901 r190 top
C22 "10u" CAP_1210 -9.145,139.008 r0 top
C23 "100u" CAP_1210 10.805,134.808 r170 top
C24 "10u" CAP_1210 -8.924,134.965 r10 top
C25 "100u" CAP_1210 1.455,138.758 r270 bottom
C26 "1uf" CAP_0603 -25.187,111.231 r180 bottom
C27 "1uf" CAP_0603 -11.737,111.231 r180 bottom
C28 "1uf" CAP_0603 30.693,111.231 r180 bottom
C29 "1uf" CAP_0603 43.855,111.308 r180 bottom
C30 "1uf" CAP_0603 -25.187,93.451 r180 bottom
C31 "1uf" CAP_0603 -11.737,93.451 r180 bottom
C32 "1uf" CAP_0603 43.755,93.358 r180 bottom
C33 "1uf" CAP_0603 30.773,93.451 r180 bottom
C44 "27p" CAP_0603 -12.145,127.758 r90 bottom
C45 "1uF" CAP_0603 7.155,156.658 r180 bottom
C46 "1uF" CAP_0603 27.755,70.158 r270 bottom
C47 "27p" CAP_0603 -12.055,122.168 r90 bottom
C48 "1uF" CAP_0603 -33.245,70.258 r270 bottom
C49 "27p" CAP_0603 -11.995,119.238 r90 bottom
C50 "0.1uF" CAP_0603 26.355,124.058 r90 bottom
C51 "0.1uF" CAP_0603 24.758,124.058 r90 bottom
C52 "27p" CAP_0603 7.755,125.108 r90 bottom
C53 "10nF" CAP_0603 38.453,130.921 r180 top
C54 "3p3" CAP_0603 -35.745,151.258 r31.2 top
C55 "3p3" CAP_0603 -33.687,147.819 r31.2 top
C56 "1p" CAP_0603 -34.795,144.708 r32.3 top
C57 "0.5p" CAP_0603 -31.535,141.999 r212.3 top
C58 "10nF" CAP_0603 -29.392,143.7 r270 top
C59 "1uF" CAP_0603 -34.395,140.608 r0 top
C60 "0.1uF" CAP_0603 -23.362,143.746 r270 top
C61 "0.1uF" CAP_0603 -28.108,130.605 r90 top
C62 "10uF" CAP_0603 -34.39,131.67 r0 top
C63 "1uF" CAP_0603 -34.39,130.42 r0 top
C64 "0.1uF" CAP_0603 -34.39,132.92 r0 top
C65 "0.1uF" CAP_0603 -26.767,130.605 r90 top
C66 "0.1uF" CAP_0603 -20.398,132.347 r180 top
C67 "1uF" CAP_0603 -20.398,133.617 r180 top
C68 "10p" CAP_0603 -26.549,149.486 r0 top
C69 "10p" CAP_0603 -29.829,146.92 r270 top
C70 "10nF" CAP_0603 -15.105,138.39 r270 top
C71 "10nF" CAP_0603 -34.395,136.758 r0 top
C72 "10nF" CAP_0603 -34.39,134.18 r0 top
C73 "1uf" CAP_0603 3.168,111.231 r180 bottom
C74 "1uf" CAP_0603 2.753,93.451 r180 bottom
C75 "1uf" CAP_0603 16.405,93.451 r180 bottom
C76 "1uf" CAP_0603 16.283,111.231 r180 bottom
C77 "22uf" CAP_0603 50.405,132.508 r180 top
C78 "0.1uf" CAP_0603 50.405,133.808 r180 top
C79 "22uf" CAP_0603 49.59,143.04 r180 top
C80 "0.1uf" CAP_0603 49.59,141.735 r180 top
C81 "22uf" CAP_0603 39.525,149.865 r46.5 top
C82 "0.1uf" CAP_0603 38.631,150.683 r46.5 top
C83 "22uf" CAP_0603 35.83,158.633 r316.5 top
C84 "0.1uf" CAP_0603 36.649,159.492 r316.5 top
C85 "1uf" CAP_0603 -5.595,157.958 r180 top
C86 "1uf" CAP_0603 -5.595,152.658 r180 top
D1 "RED" LED_0603_RED 0.348,163.458 r270 top
D2 "USBLC6-2SC6" SOT-23-6 24.881,150.029 r270 bottom
D3 "1N4148WT" FAIR-SOD-523F-2_V 19.705,138.958 r90 bottom
D4 "1N5819HW-7-F" FP-SOD123-IPC_A 11.58,143.063 r190 bottom
D5 "1N5819HW-7-F" FP-SOD123-IPC_A 11.63,134.603 r170 bottom
D6 "1N5819HW-7-F" FP-SOD123-IPC_A -9.946,138.958 r180 bottom
D7 "1N5819HW-7-F" FP-SOD123-IPC_A -9.721,134.753 r10 bottom
D8 "1N5819HW-7-F" FP-SOD123-IPC_A -9.555,143.113 r170 bottom
D9 "1N4148WT" FAIR-SOD-523F-2_V 4.405,138.758 r90 bottom
D10 "WS2812B2020" XL-1010RGBC-WS2812B -33.685,121.026 r90 top
D11 "WS2812B2020" XL-1010RGBC-WS2812B -31.122,121.026 r90 top
D12 "WS2812B2020" XL-1010RGBC-WS2812B -28.572,121.026 r90 top
D13 "WS2812B2020" XL-1010RGBC-WS2812B -26.022,121.015 r90 top
D14 "WS2812B2020" XL-1010RGBC-WS2812B -23.502,121.015 r90 top
D15 "WS2812B2020" XL-1010RGBC-WS2812B -18.322,120.976 r90 top
D16 "WS2812B2020" XL-1010RGBC-WS2812B -15.772,120.976 r90 top
D17 "WS2812B2020" XL-1010RGBC-WS2812B -13.372,120.976 r90 top
D18 "WS2812B2020" XL-1010RGBC-WS2812B -10.822,120.976 r90 top
D19 "WS2812B2020" XL-1010RGBC-WS2812B -8.272,120.976 r90 top
D20 "WS2812B2020" XL-1010RGBC-WS2812B -3.182,120.976 r90 top
D21 "WS2812B2020" XL-1010RGBC-WS2812B -0.682,120.976 r90 top
D22 "WS2812B2020" XL-1010RGBC-WS2812B 1.821,120.976 r90 top
D23 "WS2812B2020" XL-1010RGBC-WS2812B 4.318,120.976 r90 top
D24 "WS2812B2020" XL-1010RGBC-WS2812B 6.818,120.976 r90 top
D25 "WS2812B2020" XL-1010RGBC-WS2812B 12.108,121.076 r90 top
D26 "WS2812B2020" XL-1010RGBC-WS2812B 14.62,121.076 r90 top
D27 "WS2812B2020" XL-1010RGBC-WS2812B 17.133,121.076 r90 top
D28 "WS2812B2020" XL-1010RGBC-WS2812B 19.645,121.076 r90 top
D29 "WS2812B2020" XL-1010RGBC-WS2812B 22.158,121.076 r90 top
D30 "WS2812B2020" XL-1010RGBC-WS2812B 27.29,121.076 r90 top
D31 "WS2812B2020" XL-1010RGBC-WS2812B 29.79,121.076 r90 top
D32 "WS2812B2020" XL-1010RGBC-WS2812B 32.29,121.076 r90 top
D33 "WS2812B2020" XL-1010RGBC-WS2812B 34.79,121.076 r90 top
D34 "WS2812B2020" XL-1010RGBC-WS2812B 37.301,121.068 r90 top
D35 "WS2812B2020" XL-1010RGBC-WS2812B -33.685,118.436 r90 top
D36 "WS2812B2020" XL-1010RGBC-WS2812B -31.08,118.44 r90 top
D37 "WS2812B2020" XL-1010RGBC-WS2812B -28.504,118.44 r90 top
D38 "WS2812B2020" XL-1010RGBC-WS2812B -26.011,118.436 r90 top
D39 "WS2812B2020" XL-1010RGBC-WS2812B -23.491,118.436 r90 top
D40 "WS2812B2020" XL-1010RGBC-WS2812B -18.322,118.386 r90 top
D41 "WS2812B2020" XL-1010RGBC-WS2812B -15.772,118.386 r90 top
D42 "WS2812B2020" XL-1010RGBC-WS2812B -13.372,118.386 r90 top
D43 "WS2812B2020" XL-1010RGBC-WS2812B -10.822,118.386 r90 top
D44 "WS2812B2020" XL-1010RGBC-WS2812B -8.272,118.386 r90 top
D45 "WS2812B2020" XL-1010RGBC-WS2812B -3.169,118.364 r90 top locked
D46 "WS2812B2020" XL-1010RGBC-WS2812B -0.669,118.364 r90 top locked
D47 "WS2812B2020" XL-1010RGBC-WS2812B 1.831,118.364 r90 top locked
D48 "WS2812B2020" XL-1010RGBC-WS2812B 4.331,118.364 r90 top locked
D49 "WS2812B2020" XL-1010RGBC-WS2812B 6.831,118.364 r90 top locked
D50 "WS2812B2020" XL-1010RGBC-WS2812B 12.208,118.436 r90 top locked
D51 "WS2812B2020" XL-1010RGBC-WS2812B 14.708,118.436 r90 top locked
D52 "WS2812B2020" XL-1010RGBC-WS2812B 17.208,118.436 r90 top locked
D53 "WS2812B2020" XL-1010RGBC-WS2812B 19.708,118.436 r90 top locked
D54 "WS2812B2020" XL-1010RGBC-WS2812B 22.208,118.436 r90 top locked
D55 "WS2812B2020" XL-1010RGBC-WS2812B 27.248,118.535 r90 top locked
D56 "WS2812B2020" XL-1010RGBC-WS2812B 29.74,118.535 r90 top locked
D57 "WS2812B2020" XL-1010RGBC-WS2812B 32.253,118.535 r90 top locked
D58 "WS2812B2020" XL-1010RGBC-WS2812B 34.758,118.535 r90 top locked
D59 "WS2812B2020" XL-1010RGBC-WS2812B 37.265,118.535 r90 top locked
D60 "WS2812B2020" XL-1010RGBC-WS2812B -34.932,110.816 r0 top locked
D61 "WS2812B2020" XL-1010RGBC-WS2812B -32.392,110.816 r0 top locked
D62 "WS2812B2020" XL-1010RGBC-WS2812B -29.852,110.816 r0 top
D63 "WS2812B2020" XL-1010RGBC-WS2812B -27.312,110.816 r0 top
D64 "WS2812B2020" XL-1010RGBC-WS2812B -24.772,110.816 r0 top locked
D65 "WS2812B2020" XL-1010RGBC-WS2812B -22.232,110.816 r0 top locked
D66 "WS2812B2020" XL-1010RGBC-WS2812B -19.692,110.816 r0 top locked
D67 "WS2812B2020" XL-1010RGBC-WS2812B -17.152,110.816 r0 top locked
D68 "WS2812B2020" XL-1010RGBC-WS2812B -14.612,110.816 r0 top locked
D69 "WS2812B2020" XL-1010RGBC-WS2812B -12.072,110.816 r0 top locked
D70 "WS2812B2020" XL-1010RGBC-WS2812B -9.532,110.816 r0 top locked
D71 "WS2812B2020" XL-1010RGBC-WS2812B -6.992,110.816 r0 top locked
D72 "WS2812B2020" XL-1010RGBC-WS2812B -4.452,110.816 r0 top locked
D73 "WS2812B2020" XL-1010RGBC-WS2812B -1.912,110.816 r0 top locked
D74 "WS2812B2020" XL-1010RGBC-WS2812B 0.628,110.816 r0 top locked
D75 "WS2812B2020" XL-1010RGBC-WS2812B 3.168,110.816 r0 top locked
D76 "WS2812B2020" XL-1010RGBC-WS2812B 5.708,110.816 r0 top locked
D77 "WS2812B2020" XL-1010RGBC-WS2812B 8.248,110.816 r0 top locked
D78 "WS2812B2020" XL-1010RGBC-WS2812B 10.788,110.816 r0 top locked
D79 "WS2812B2020" XL-1010RGBC-WS2812B 13.328,110.816 r0 top locked
D80 "WS2812B2020" XL-1010RGBC-WS2812B 15.868,110.816 r0 top locked
D81 "WS2812B2020" XL-1010RGBC-WS2812B 18.408,110.816 r0 top locked
D82 "WS2812B2020" XL-1010RGBC-WS2812B 20.948,110.816 r0 top locked
D83 "WS2812B2020" XL-1010RGBC-WS2812B 23.488,110.816 r0 top locked
D84 "WS2812B2020" XL-1010RGBC-WS2812B 26.028,110.816 r0 top locked
D85 "WS2812B2020" XL-1010RGBC-WS2812B 28.568,110.816 r0 top locked
D86 "WS2812B2020" XL-1010RGBC-WS2812B 31.108,110.816 r0 top locked
D87 "WS2812B2020" XL-1010RGBC-WS2812B 33.648,110.816 r0 top locked
D88 "WS2812B2020" XL-1010RGBC-WS2812B 36.188,110.816 r0 top locked
D89 "WS2812B2020" XL-1010RGBC-WS2812B 38.728,110.816 r0 top locked
D90 "WS2812B2020" XL-1010RGBC-WS2812B -34.845,108.268 r0 top locked
D91 "WS2812B2020" XL-1010RGBC-WS2812B -32.395,108.268 r0 top locked
D92 "WS2812B2020" XL-1010RGBC-WS2812B -29.852,108.289 r0 top
D93 "WS2812B2020" XL-1010RGBC-WS2812B -27.312,108.289 r0 top
D94 "WS2812B2020" XL-1010RGBC-WS2812B -24.772,108.276 r0 top locked
D95 "WS2812B2020" XL-1010RGBC-WS2812B -22.232,108.276 r0 top locked
D96 "WS2812B2020" XL-1010RGBC-WS2812B -19.692,108.276 r0 top locked
D97 "WS2812B2020" XL-1010RGBC-WS2812B -17.152,108.276 r0 top locked
D98 "WS2812B2020" XL-1010RGBC-WS2812B -14.612,108.276 r0 top locked
D99 "WS2812B2020" XL-1010RGBC-WS2812B -12.072,108.276 r0 top locked
D100 "WS2812B2020" XL-1010RGBC-WS2812B -9.532,108.276 r0 top locked
D101 "WS2812B2020" XL-1010RGBC-WS2812B -6.992,108.276 r0 top locked
D102 "WS2812B2020" XL-1010RGBC-WS2812B -4.452,108.276 r0 top locked
D103 "WS2812B2020" XL-1010RGBC-WS2812B -1.912,108.276 r0 top locked
D104 "WS2812B2020" XL-1010RGBC-WS2812B 0.628,108.276 r0 top locked
D105 "WS2812B2020" XL-1010RGBC-WS2812B 3.168,108.276 r0 top locked
D106 "WS2812B2020" XL-1010RGBC-WS2812B 5.708,108.276 r0 top locked
D107 "WS2812B2020" XL-1010RGBC-WS2812B 8.248,108.276 r0 top locked
D108 "WS2812B2020" XL-1010RGBC-WS2812B 10.788,108.276 r0 top locked
D109 "WS2812B2020" XL-1010RGBC-WS2812B 13.328,108.276 r0 top locked
D110 "WS2812B2020" XL-1010RGBC-WS2812B 15.868,108.276 r0 top locked
D111 "WS2812B2020" XL-1010RGBC-WS2812B 18.408,108.276 r0 top locked
D112 "WS2812B2020" XL-1010RGBC-WS2812B 20.948,108.276 r0 top locked
D113 "WS2812B2020" XL-1010RGBC-WS2812B 23.488,108.276 r0 top locked
D114 "WS2812B2020" XL-1010RGBC-WS2812B 26.028,108.276 r0 top locked
D115 "WS2812B2020" XL-1010RGBC-WS2812B 28.568,108.276 r0 top locked
D116 "WS2812B2020" XL-1010RGBC-WS2812B 31.108,108.276 r0 top locked
D117 "WS2812B2020" XL-1010RGBC-WS2812B 33.648,108.276 r0 top locked
D118 "WS2812B2020" XL-1010RGBC-WS2812B 36.188,108.276 r0 top locked
D119 "WS2812B2020" XL-1010RGBC-WS2812B 38.728,108.276 r0 top locked
D120 "WS2812B2020" XL-1010RGBC-WS2812B -34.845,105.743 r0 top
D121 "WS2812B2020" XL-1010RGBC-WS2812B -32.395,105.728 r0 top locked
D122 "WS2812B2020" XL-1010RGBC-WS2812B -29.856,105.743 r0 top locked
D123 "WS2812B2020" XL-1010RGBC-WS2812B -27.295,105.718 r0 top locked
D124 "WS2812B2020" XL-1010RGBC-WS2812B -24.745,105.718 r0 top locked
D125 "WS2812B2020" XL-1010RGBC-WS2812B -22.245,105.718 r0 top locked
D126 "WS2812B2020" XL-1010RGBC-WS2812B -19.695,105.718 r0 top locked
D127 "WS2812B2020" XL-1010RGBC-WS2812B -17.145,105.718 r0 top locked
D128 "WS2812B2020" XL-1010RGBC-WS2812B -14.595,105.718 r0 top locked
D129 "WS2812B2020" XL-1010RGBC-WS2812B -12.069,105.659 r0 top locked
D130 "WS2812B2020" XL-1010RGBC-WS2812B -9.509,105.659 r0 top locked
D131 "WS2812B2020" XL-1010RGBC-WS2812B -6.95,105.659 r0 top locked
D132 "WS2812B2020" XL-1010RGBC-WS2812B -4.39,105.659 r0 top locked
D133 "WS2812B2020" XL-1010RGBC-WS2812B -1.912,105.736 r0 top locked
D134 "WS2812B2020" XL-1010RGBC-WS2812B 0.628,105.736 r0 top locked
D135 "WS2812B2020" XL-1010RGBC-WS2812B 3.205,105.718 r0 top locked
D136 "WS2812B2020" XL-1010RGBC-WS2812B 5.705,105.718 r0 top locked
D137 "WS2812B2020" XL-1010RGBC-WS2812B 8.305,105.708 r0 top locked
D138 "WS2812B2020" XL-1010RGBC-WS2812B 10.805,105.768 r0 top locked
D139 "WS2812B2020" XL-1010RGBC-WS2812B 13.326,105.659 r0 top locked
D140 "WS2812B2020" XL-1010RGBC-WS2812B 15.885,105.659 r0 top locked
D141 "WS2812B2020" XL-1010RGBC-WS2812B 18.445,105.659 r0 top locked
D142 "WS2812B2020" XL-1010RGBC-WS2812B 20.954,105.659 r0 top locked
D143 "WS2812B2020" XL-1010RGBC-WS2812B 23.505,105.658 r0 top locked
D144 "WS2812B2020" XL-1010RGBC-WS2812B 26.055,105.658 r0 top locked
D145 "WS2812B2020" XL-1010RGBC-WS2812B 28.555,105.658 r0 top locked
D146 "WS2812B2020" XL-1010RGBC-WS2812B 31.105,105.658 r0 top locked
D147 "WS2812B2020" XL-1010RGBC-WS2812B 33.655,105.658 r0 top locked
D148 "WS2812B2020" XL-1010RGBC-WS2812B 36.205,105.658 r0 top locked
D149 "WS2812B2020" XL-1010RGBC-WS2812B 38.67,105.659 r0 top locked
D150 "WS2812B2020" XL-1010RGBC-WS2812B -34.845,103.178 r0 top
D151 "WS2812B2020" XL-1010RGBC-WS2812B -32.378,103.178 r0 top locked
D152 "WS2812B2020" XL-1010RGBC-WS2812B -29.852,103.178 r0 top
D153 "WS2812B2020" XL-1010RGBC-WS2812B -27.295,103.168 r0 top locked
D154 "WS2812B2020" XL-1010RGBC-WS2812B -24.745,103.168 r0 top locked
D155 "WS2812B2020" XL-1010RGBC-WS2812B -22.245,103.168 r0 top locked
D156 "WS2812B2020" XL-1010RGBC-WS2812B -19.695,103.168 r0 top locked
D157 "WS2812B2020" XL-1010RGBC-WS2812B -17.141,103.154 r0 top
D158 "WS2812B2020" XL-1010RGBC-WS2812B -14.595,103.168 r0 top locked
D159 "WS2812B2020" XL-1010RGBC-WS2812B -12.072,103.169 r0 top
D160 "WS2812B2020" XL-1010RGBC-WS2812B -9.495,103.118 r0 top locked
D161 "WS2812B2020" XL-1010RGBC-WS2812B -6.945,103.118 r0 top locked
D162 "WS2812B2020" XL-1010RGBC-WS2812B -4.395,103.118 r0 top locked
D163 "WS2812B2020" XL-1010RGBC-WS2812B -1.895,103.158 r0 top locked
D164 "WS2812B2020" XL-1010RGBC-WS2812B 0.615,103.175 r0 top locked
D165 "WS2812B2020" XL-1010RGBC-WS2812B 3.205,103.168 r0 top locked
D166 "WS2812B2020" XL-1010RGBC-WS2812B 5.705,103.158 r0 top locked
D167 "WS2812B2020" XL-1010RGBC-WS2812B 8.248,103.158 r0 top locked
D168 "WS2812B2020" XL-1010RGBC-WS2812B 10.805,103.158 r0 top locked
D169 "WS2812B2020" XL-1010RGBC-WS2812B 13.305,103.118 r0 top locked
D170 "WS2812B2020" XL-1010RGBC-WS2812B 15.905,103.118 r0 top locked
D171 "WS2812B2020" XL-1010RGBC-WS2812B 18.405,103.058 r0 top locked
D172 "WS2812B2020" XL-1010RGBC-WS2812B 20.955,103.118 r0 top locked
D173 "WS2812B2020" XL-1010RGBC-WS2812B 23.505,103.118 r0 top locked
D174 "WS2812B2020" XL-1010RGBC-WS2812B 26.028,103.108 r0 top locked
D175 "WS2812B2020" XL-1010RGBC-WS2812B 28.505,103.108 r0 top locked
D176 "WS2812B2020" XL-1010RGBC-WS2812B 31.105,103.108 r0 top locked
D177 "WS2812B2020" XL-1010RGBC-WS2812B 33.655,103.108 r0 top locked
D178 "WS2812B2020" XL-1010RGBC-WS2812B 36.205,103.118 r0 top locked
D179 "WS2812B2020" XL-1010RGBC-WS2812B 38.655,103.118 r0 top locked
D180 "WS2812B2020" XL-1010RGBC-WS2812B -34.845,100.668 r0 top locked
D181 "WS2812B2020" XL-1010RGBC-WS2812B -32.395,100.618 r0 top locked
D182 "WS2812B2020" XL-1010RGBC-WS2812B -29.895,100.665 r0 top
D183 "WS2812B2020" XL-1010RGBC-WS2812B -27.295,100.668 r0 top locked
D184 "WS2812B2020" XL-1010RGBC-WS2812B -24.745,100.618 r0 top locked
D185 "WS2812B2020" XL-1010RGBC-WS2812B -22.232,100.618 r0 top locked
D186 "WS2812B2020" XL-1010RGBC-WS2812B -19.692,100.668 r0 top locked
D187 "WS2812B2020" XL-1010RGBC-WS2812B -17.148,100.667 r0 top
D188 "WS2812B2020" XL-1010RGBC-WS2812B -14.612,100.618 r0 top locked
D189 "WS2812B2020" XL-1010RGBC-WS2812B -12.072,100.617 r0 top
D190 "WS2812B2020" XL-1010RGBC-WS2812B -9.445,100.608 r0 top locked
D191 "WS2812B2020" XL-1010RGBC-WS2812B -6.945,100.608 r0 top locked
D192 "WS2812B2020" XL-1010RGBC-WS2812B -4.395,100.568 r0 top locked
D193 "WS2812B2020" XL-1010RGBC-WS2812B -1.895,100.618 r0 top locked
D194 "WS2812B2020" XL-1010RGBC-WS2812B 0.628,100.658 r0 top locked
D195 "WS2812B2020" XL-1010RGBC-WS2812B 3.168,100.658 r0 top locked
D196 "WS2812B2020" XL-1010RGBC-WS2812B 5.708,100.608 r0 top locked
D197 "WS2812B2020" XL-1010RGBC-WS2812B 8.255,100.618 r0 top locked
D198 "WS2812B2020" XL-1010RGBC-WS2812B 10.805,100.618 r0 top locked
D199 "WS2812B2020" XL-1010RGBC-WS2812B 13.305,100.568 r0 top locked
D200 "WS2812B2020" XL-1010RGBC-WS2812B 15.905,100.568 r0 top locked
D201 "WS2812B2020" XL-1010RGBC-WS2812B 18.408,100.518 r0 top locked
D202 "WS2812B2020" XL-1010RGBC-WS2812B 20.948,100.558 r0 top locked
D203 "WS2812B2020" XL-1010RGBC-WS2812B 23.505,100.568 r0 top locked
D204 "WS2812B2020" XL-1010RGBC-WS2812B 26.028,100.568 r0 top locked
D205 "WS2812B2020" XL-1010RGBC-WS2812B 28.505,100.568 r0 top locked
D206 "WS2812B2020" XL-1010RGBC-WS2812B 31.055,100.558 r0 top locked
D207 "WS2812B2020" XL-1010RGBC-WS2812B 33.648,100.558 r0 top locked
D208 "WS2812B2020" XL-1010RGBC-WS2812B 36.205,100.558 r0 top locked
D209 "WS2812B2020" XL-1010RGBC-WS2812B 38.655,100.608 r0 top locked
D210 "WS2812B2020" XL-1010RGBC-WS2812B -34.932,93.036 r0 top locked
D211 "WS2812B2020" XL-1010RGBC-WS2812B -32.392,93.036 r0 top locked
D212 "WS2812B2020" XL-1010RGBC-WS2812B -29.852,93.036 r0 top locked
D213 "WS2812B2020" XL-1010RGBC-WS2812B -27.312,93.036 r0 top locked
D214 "WS2812B2020" XL-1010RGBC-WS2812B -24.772,93.036 r0 top locked
D215 "WS2812B2020" XL-1010RGBC-WS2812B -22.232,93.036 r0 top locked
D216 "WS2812B2020" XL-1010RGBC-WS2812B -19.692,93.036 r0 top locked
D217 "WS2812B2020" XL-1010RGBC-WS2812B -17.152,93.036 r0 top locked
D218 "WS2812B2020" XL-1010RGBC-WS2812B -14.612,93.036 r0 top locked
D219 "WS2812B2020" XL-1010RGBC-WS2812B -12.072,93.036 r0 top locked
D220 "WS2812B2020" XL-1010RGBC-WS2812B -9.532,93.036 r0 top locked
D221 "WS2812B2020" XL-1010RGBC-WS2812B -6.992,93.036 r0 top locked
D222 "WS2812B2020" XL-1010RGBC-WS2812B -4.452,93.036 r0 top locked
D223 "WS2812B2020" XL-1010RGBC-WS2812B -1.912,93.036 r0 top locked
D224 "WS2812B2020" XL-1010RGBC-WS2812B 0.628,93.036 r0 top locked
D225 "WS2812B2020" XL-1010RGBC-WS2812B 3.168,93.036 r0 top locked
D226 "WS2812B2020" XL-1010RGBC-WS2812B 5.708,93.036 r0 top locked
D227 "WS2812B2020" XL-1010RGBC-WS2812B 8.248,93.036 r0 top locked
D228 "WS2812B2020" XL-1010RGBC-WS2812B 10.788,93.036 r0 top locked
D229 "WS2812B2020" XL-1010RGBC-WS2812B 13.328,93.036 r0 top locked
D230 "WS2812B2020" XL-1010RGBC-WS2812B 15.868,93.036 r0 top locked
D231 "WS2812B2020" XL-1010RGBC-WS2812B 18.408,93.036 r0 top locked
D232 "WS2812B2020" XL-1010RGBC-WS2812B 20.948,93.036 r0 top locked
D233 "WS2812B2020" XL-1010RGBC-WS2812B 23.488,93.036 r0 top locked
D234 "WS2812B2020" XL-1010RGBC-WS2812B 26.028,93.036 r0 top locked
D235 "WS2812B2020" XL-1010RGBC-WS2812B 28.568,93.036 r0 top locked
D236 "WS2812B2020" XL-1010RGBC-WS2812B 31.108,93.036 r0 top locked
D237 "WS2812B2020" XL-1010RGBC-WS2812B 33.648,93.036 r0 top locked
D238 "WS2812B2020" XL-1010RGBC-WS2812B 36.188,93.036 r0 top locked
D239 "WS2812B2020" XL-1010RGBC-WS2812B 38.728,93.036 r0 top locked
D240 "WS2812B2020" XL-1010RGBC-WS2812B -34.932,90.468 r0 top
D241 "WS2812B2020" XL-1010RGBC-WS2812B -32.392,90.518 r0 top locked
D242 "WS2812B2020" XL-1010RGBC-WS2812B -29.852,90.468 r0 top locked
D243 "WS2812B2020" XL-1010RGBC-WS2812B -27.312,90.518 r0 top locked
D244 "WS2812B2020" XL-1010RGBC-WS2812B -24.772,90.518 r0 top locked
D245 "WS2812B2020" XL-1010RGBC-WS2812B -22.232,90.518 r0 top locked
D246 "WS2812B2020" XL-1010RGBC-WS2812B -19.692,90.518 r0 top locked
D247 "WS2812B2020" XL-1010RGBC-WS2812B -17.152,90.518 r0 top locked
D248 "WS2812B2020" XL-1010RGBC-WS2812B -14.612,90.518 r0 top locked
D249 "WS2812B2020" XL-1010RGBC-WS2812B -12.072,90.518 r0 top locked
D250 "WS2812B2020" XL-1010RGBC-WS2812B -9.532,90.518 r0 top locked
D251 "WS2812B2020" XL-1010RGBC-WS2812B -6.992,90.518 r0 top locked
D252 "WS2812B2020" XL-1010RGBC-WS2812B -4.452,90.518 r0 top locked
D253 "WS2812B2020" XL-1010RGBC-WS2812B -1.912,90.518 r0 top locked
D254 "WS2812B2020" XL-1010RGBC-WS2812B 0.628,90.518 r0 top locked
D255 "WS2812B2020" XL-1010RGBC-WS2812B 3.155,90.518 r0 top locked
D256 "WS2812B2020" XL-1010RGBC-WS2812B 5.705,90.518 r0 top locked
D257 "WS2812B2020" XL-1010RGBC-WS2812B 8.248,90.518 r0 top locked
D258 "WS2812B2020" XL-1010RGBC-WS2812B 10.788,90.468 r0 top locked
D259 "WS2812B2020" XL-1010RGBC-WS2812B 13.328,90.468 r0 top locked
D260 "WS2812B2020" XL-1010RGBC-WS2812B 15.868,90.518 r0 top locked
D261 "WS2812B2020" XL-1010RGBC-WS2812B 18.408,90.518 r0 top locked
D262 "WS2812B2020" XL-1010RGBC-WS2812B 20.948,90.518 r0 top locked
D263 "WS2812B2020" XL-1010RGBC-WS2812B 23.488,90.518 r0 top locked
D264 "WS2812B2020" XL-1010RGBC-WS2812B 26.105,90.518 r0 top locked
D265 "WS2812B2020" XL-1010RGBC-WS2812B 28.568,90.518 r0 top locked
D266 "WS2812B2020" XL-1010RGBC-WS2812B 31.108,90.518 r0 top locked
D267 "WS2812B2020" XL-1010RGBC-WS2812B 33.648,90.518 r0 top locked
D268 "WS2812B2020" XL-1010RGBC-WS2812B 36.188,90.518 r0 top locked
D269 "WS2812B2020" XL-1010RGBC-WS2812B 38.728,90.518 r0 top locked
D270 "WS2812B2020" XL-1010RGBC-WS2812B -34.945,87.918 r0 top locked
D271 "WS2812B2020" XL-1010RGBC-WS2812B -32.395,87.968 r0 top locked
D272 "WS2812B2020" XL-1010RGBC-WS2812B -29.845,87.918 r0 top locked
D273 "WS2812B2020" XL-1010RGBC-WS2812B -27.295,87.968 r0 top locked
D274 "WS2812B2020" XL-1010RGBC-WS2812B -24.845,87.958 r0 top locked
D275 "WS2812B2020" XL-1010RGBC-WS2812B -22.245,87.958 r0 top locked
D276 "WS2812B2020" XL-1010RGBC-WS2812B -19.673,87.98 r0 top
D277 "WS2812B2020" XL-1010RGBC-WS2812B -17.145,88.018 r0 top locked
D278 "WS2812B2020" XL-1010RGBC-WS2812B -14.595,87.968 r0 top locked
D279 "WS2812B2020" XL-1010RGBC-WS2812B -12.072,87.968 r0 top locked
D280 "WS2812B2020" XL-1010RGBC-WS2812B -9.545,87.968 r0 top locked
D281 "WS2812B2020" XL-1010RGBC-WS2812B -6.992,87.968 r0 top locked
D282 "WS2812B2020" XL-1010RGBC-WS2812B -4.452,88.018 r0 top locked
D283 "WS2812B2020" XL-1010RGBC-WS2812B -1.912,87.968 r0 top locked
D284 "WS2812B2020" XL-1010RGBC-WS2812B 0.628,88.018 r0 top locked
D285 "WS2812B2020" XL-1010RGBC-WS2812B 3.168,87.968 r0 top locked
D286 "WS2812B2020" XL-1010RGBC-WS2812B 5.708,88.018 r0 top locked
D287 "WS2812B2020" XL-1010RGBC-WS2812B 8.255,87.968 r0 top locked
D288 "WS2812B2020" XL-1010RGBC-WS2812B 10.805,87.918 r0 top locked
D289 "WS2812B2020" XL-1010RGBC-WS2812B 13.305,87.908 r0 top locked
D290 "WS2812B2020" XL-1010RGBC-WS2812B 15.855,87.908 r0 top locked
D291 "WS2812B2020" XL-1010RGBC-WS2812B 18.405,87.908 r0 top locked
D292 "WS2812B2020" XL-1010RGBC-WS2812B 20.955,87.908 r0 top locked
D293 "WS2812B2020" XL-1010RGBC-WS2812B 23.455,87.908 r0 top locked
D294 "WS2812B2020" XL-1010RGBC-WS2812B 26.04,87.946 r0 top
D295 "WS2812B2020" XL-1010RGBC-WS2812B 28.555,87.908 r0 top locked
D296 "WS2812B2020" XL-1010RGBC-WS2812B 31.055,87.908 r0 top locked
D297 "WS2812B2020" XL-1010RGBC-WS2812B 33.605,87.908 r0 top locked
D298 "WS2812B2020" XL-1010RGBC-WS2812B 36.155,87.858 r0 top locked
D299 "WS2812B2020" XL-1010RGBC-WS2812B 38.705,87.858 r0 top locked
D300 "WS2812B2020" XL-1010RGBC-WS2812B -34.899,85.412 r0 top
D301 "WS2812B2020" XL-1010RGBC-WS2812B -32.395,85.418 r0 top locked
D302 "WS2812B2020" XL-1010RGBC-WS2812B -29.845,85.368 r0 top locked
D303 "WS2812B2020" XL-1010RGBC-WS2812B -27.295,85.418 r0 top locked
D304 "WS2812B2020" XL-1010RGBC-WS2812B -24.895,85.408 r0 top locked
D305 "WS2812B2020" XL-1010RGBC-WS2812B -22.245,85.408 r0 top locked
D306 "WS2812B2020" XL-1010RGBC-WS2812B -19.663,85.445 r0 top
D307 "WS2812B2020" XL-1010RGBC-WS2812B -17.149,85.469 r0 top
D308 "WS2812B2020" XL-1010RGBC-WS2812B -14.67,85.395 r0 top
D309 "WS2812B2020" XL-1010RGBC-WS2812B -12.098,85.4 r0 top
D310 "WS2812B2020" XL-1010RGBC-WS2812B -9.545,85.408 r0 top locked
D311 "WS2812B2020" XL-1010RGBC-WS2812B -6.992,85.408 r0 top locked
D312 "WS2812B2020" XL-1010RGBC-WS2812B -4.452,85.408 r0 top locked
D313 "WS2812B2020" XL-1010RGBC-WS2812B -1.895,85.408 r0 top locked
D314 "WS2812B2020" XL-1010RGBC-WS2812B 0.628,85.408 r0 top locked
D315 "WS2812B2020" XL-1010RGBC-WS2812B 3.168,85.408 r0 top locked
D316 "WS2812B2020" XL-1010RGBC-WS2812B 5.708,85.408 r0 top locked
D317 "WS2812B2020" XL-1010RGBC-WS2812B 8.255,85.408 r0 top locked
D318 "WS2812B2020" XL-1010RGBC-WS2812B 10.805,85.408 r0 top locked
D319 "WS2812B2020" XL-1010RGBC-WS2812B 13.305,85.408 r0 top locked
D320 "WS2812B2020" XL-1010RGBC-WS2812B 15.855,85.408 r0 top locked
D321 "WS2812B2020" XL-1010RGBC-WS2812B 18.405,85.408 r0 top locked
D322 "WS2812B2020" XL-1010RGBC-WS2812B 20.948,85.408 r0 top locked
D323 "WS2812B2020" XL-1010RGBC-WS2812B 23.455,85.368 r0 top locked
D324 "WS2812B2020" XL-1010RGBC-WS2812B 26.028,85.353 r0 top
D325 "WS2812B2020" XL-1010RGBC-WS2812B 28.555,85.368 r0 top locked
D326 "WS2812B2020" XL-1010RGBC-WS2812B 31.055,85.368 r0 top locked
D327 "WS2812B2020" XL-1010RGBC-WS2812B 33.605,85.368 r0 top locked
D328 "WS2812B2020" XL-1010RGBC-WS2812B 36.155,85.318 r0 top locked
D329 "WS2812B2020" XL-1010RGBC-WS2812B 38.705,85.318 r0 top locked
D330 "WS2812B2020" XL-1010RGBC-WS2812B -34.909,82.873 r0 top
D331 "WS2812B2020" XL-1010RGBC-WS2812B -32.345,82.868 r0 top locked
D332 "WS2812B2020" XL-1010RGBC-WS2812B -29.845,82.818 r0 top locked
D333 "WS2812B2020" XL-1010RGBC-WS2812B -27.295,82.868 r0 top locked
D334 "WS2812B2020" XL-1010RGBC-WS2812B -24.895,82.868 r0 top locked
D335 "WS2812B2020" XL-1010RGBC-WS2812B -22.232,82.868 r0 top locked
D336 "WS2812B2020" XL-1010RGBC-WS2812B -19.695,82.868 r0 top locked
D337 "WS2812B2020" XL-1010RGBC-WS2812B -17.152,82.845 r0 top
D338 "WS2812B2020" XL-1010RGBC-WS2812B -14.591,82.779 r0 top
D339 "WS2812B2020" XL-1010RGBC-WS2812B -12.119,82.742 r0 top
D340 "WS2812B2020" XL-1010RGBC-WS2812B -9.549,82.802 r0 top
D341 "WS2812B2020" XL-1010RGBC-WS2812B -6.995,82.858 r0 top locked
D342 "WS2812B2020" XL-1010RGBC-WS2812B -4.48,82.873 r0 top locked
D343 "WS2812B2020" XL-1010RGBC-WS2812B -1.88,82.853 r0 top locked
D344 "WS2812B2020" XL-1010RGBC-WS2812B 0.628,82.868 r0 top locked
D345 "WS2812B2020" XL-1010RGBC-WS2812B 3.168,82.868 r0 top locked
D346 "WS2812B2020" XL-1010RGBC-WS2812B 5.708,82.818 r0 top locked
D347 "WS2812B2020" XL-1010RGBC-WS2812B 8.255,82.868 r0 top locked
D348 "WS2812B2020" XL-1010RGBC-WS2812B 10.805,82.868 r0 top locked
D349 "WS2812B2020" XL-1010RGBC-WS2812B 13.305,82.868 r0 top locked
D350 "WS2812B2020" XL-1010RGBC-WS2812B 15.855,82.868 r0 top locked
D351 "WS2812B2020" XL-1010RGBC-WS2812B 18.39,82.873 r0 top locked
D352 "WS2812B2020" XL-1010RGBC-WS2812B 20.955,82.958 r0 top locked
D353 "WS2812B2020" XL-1010RGBC-WS2812B 23.455,82.918 r0 top locked
D354 "WS2812B2020" XL-1010RGBC-WS2812B 26.028,82.918 r0 top locked
D355 "WS2812B2020" XL-1010RGBC-WS2812B 28.555,82.918 r0 top locked
D356 "WS2812B2020" XL-1010RGBC-WS2812B 31.055,82.918 r0 top locked
D357 "WS2812B2020" XL-1010RGBC-WS2812B 33.605,82.918 r0 top locked
D358 "WS2812B2020" XL-1010RGBC-WS2812B 36.155,82.868 r0 top locked
D359 "WS2812B2020" XL-1010RGBC-WS2812B 38.705,82.868 r0 top locked
D360 "WS2812B2020" XL-1010RGBC-WS2812B -33.655,75.297 r90 top locked
D361 "WS2812B2020" XL-1010RGBC-WS2812B -31.113,75.301 r90 top locked
D362 "WS2812B2020" XL-1010RGBC-WS2812B -28.545,75.301 r90 top locked
D363 "WS2812B2020" XL-1010RGBC-WS2812B -26.005,75.308 r90 top locked
D364 "WS2812B2020" XL-1010RGBC-WS2812B -23.455,75.308 r90 top locked
D365 "WS2812B2020" XL-1010RGBC-WS2812B -18.441,75.311 r90 top locked
D366 "WS2812B2020" XL-1010RGBC-WS2812B -15.905,75.308 r90 top locked
D367 "WS2812B2020" XL-1010RGBC-WS2812B -13.355,75.308 r90 top locked
D368 "WS2812B2020" XL-1010RGBC-WS2812B -10.77,75.3 r90 top
D369 "WS2812B2020" XL-1010RGBC-WS2812B -8.235,75.285 r90 top
D370 "WS2812B2020" XL-1010RGBC-WS2812B -3.214,75.303 r90 top locked
D371 "WS2812B2020" XL-1010RGBC-WS2812B -0.717,75.283 r90 top
D372 "WS2812B2020" XL-1010RGBC-WS2812B 1.89,75.285 r90 top
D373 "WS2812B2020" XL-1010RGBC-WS2812B 4.379,75.324 r90 top
D374 "WS2812B2020" XL-1010RGBC-WS2812B 6.974,75.351 r90 top
D375 "WS2812B2020" XL-1010RGBC-WS2812B 11.991,75.256 r90 top
D376 "WS2812B2020" XL-1010RGBC-WS2812B 14.511,75.256 r90 top
D377 "WS2812B2020" XL-1010RGBC-WS2812B 17.13,75.27 r90 top
D378 "WS2812B2020" XL-1010RGBC-WS2812B 19.575,75.285 r90 top
D379 "WS2812B2020" XL-1010RGBC-WS2812B 22.172,75.256 r90 top
D380 "WS2812B2020" XL-1010RGBC-WS2812B 27.288,75.346 r90 top locked
D381 "WS2812B2020" XL-1010RGBC-WS2812B 29.925,75.3 r90 top
D382 "WS2812B2020" XL-1010RGBC-WS2812B 32.385,75.285 r90 top
D383 "WS2812B2020" XL-1010RGBC-WS2812B 34.845,75.255 r90 top
D384 "WS2812B2020" XL-1010RGBC-WS2812B 37.355,75.301 r90 top
D385 "WS2812B2020" XL-1010RGBC-WS2812B -33.696,72.677 r90 top locked
D386 "WS2812B2020" XL-1010RGBC-WS2812B -31.145,72.666 r90 top locked
D387 "WS2812B2020" XL-1010RGBC-WS2812B -28.545,72.658 r90 top locked
D388 "WS2812B2020" XL-1010RGBC-WS2812B -25.995,72.658 r90 top locked
D389 "WS2812B2020" XL-1010RGBC-WS2812B -23.495,72.666 r90 top locked
D390 "WS2812B2020" XL-1010RGBC-WS2812B -18.495,72.808 r90 top locked
D391 "WS2812B2020" XL-1010RGBC-WS2812B -15.945,72.808 r90 top locked
D392 "WS2812B2020" XL-1010RGBC-WS2812B -13.345,72.808 r90 top locked
D393 "WS2812B2020" XL-1010RGBC-WS2812B -10.795,72.808 r90 top locked
D394 "WS2812B2020" XL-1010RGBC-WS2812B -8.245,72.808 r90 top locked
D395 "WS2812B2020" XL-1010RGBC-WS2812B -3.215,72.831 r90 top locked
D396 "WS2812B2020" XL-1010RGBC-WS2812B -0.665,72.831 r90 top locked
D397 "WS2812B2020" XL-1010RGBC-WS2812B 1.885,72.831 r90 top locked
D398 "WS2812B2020" XL-1010RGBC-WS2812B 4.385,72.831 r90 top locked
D399 "WS2812B2020" XL-1010RGBC-WS2812B 6.935,72.831 r90 top locked
D400 "WS2812B2020" XL-1010RGBC-WS2812B 12.028,72.851 r90 top locked
D401 "WS2812B2020" XL-1010RGBC-WS2812B 14.555,72.858 r90 top locked
D402 "WS2812B2020" XL-1010RGBC-WS2812B 17.105,72.858 r90 top locked
D403 "WS2812B2020" XL-1010RGBC-WS2812B 19.655,72.908 r90 top locked
D404 "WS2812B2020" XL-1010RGBC-WS2812B 22.205,72.908 r90 top locked
D405 "WS2812B2020" XL-1010RGBC-WS2812B 27.285,72.833 r90 top locked
D406 "WS2812B2020" XL-1010RGBC-WS2812B 29.855,72.858 r90 top locked
D407 "WS2812B2020" XL-1010RGBC-WS2812B 32.405,72.858 r90 top locked
D408 "WS2812B2020" XL-1010RGBC-WS2812B 34.905,72.858 r90 top locked
D409 "WS2812B2020" XL-1010RGBC-WS2812B 37.505,72.858 r90 top locked
D410 "B0520LW-7-F" FP-SOD123-MFG 48.055,134.833 r90 top value=170pF
D411 "B0520LW-7-F" FP-SOD123-MFG 39.93,154.218 r46.5 top value=170pF
J1 "B4105-GF-A-060" USB4105-GF-A-060 24.631,156.663 r180 top
J3 "Breadboard_CorrectPins" Breadboard_CustomClips_CorrectPins_1 1.898,96.846 r0 top locked
J4 "951103-8622-AR" FP-951103-8622-AR-MFG 35.755,164.408 r180 top
J6 "22-28-6054" FP-22-28-6054-MFG 48.755,97.628 r90 top
J7 "22-28-6054" FP-22-28-6054-MFG 48.855,120.818 r90 top
JP1 "Solder Jumper" SolderJumper_Single 49.683,145.269 r0 top
JP2 "Solder Jumper" SolderJumper_Single 49.683,144.369 r0 top
JP3 "Solder Jumper" SolderJumper_Single 33.958,157.387 r136.5 top
JP4 "Solder Jumper" SolderJumper_Single 34.567,158.042 r136.5 top
JP5 "Solder Jumper" SolderJumper_Single 48.255,90.208 r180 top
JP6 "Solder Jumper" SolderJumper_Single 48.355,113.408 r180 top
L1 "2n2" IND_0603 -34.095,149.958 r301.2 top
L2 "1n2" IND_0603 -33.135,143.399 r121.3 top
L3 "24nH" IND_0603 -27.745,143.708 r90 top
L4 "2.0nH" IND_0603 -34.395,139.318 r0 top
L5 "ASPI-4030S" ASPI-4030S 45.705,140.458 r90 top
L6 "ASPI-4030S" ASPI-4030S 35.217,153.99 r136.5 top
Q1 "BSS138" FP-318-08-IPC_B -13.756,157.858 r180 top
Q2 "BSS138" FP-318-08-IPC_B -13.735,152.608 r180 top
R1 "1k" RES_0603 2.055,163.458 r270 top
R2 "5k1" RES_0603 30.505,154.908 r270 top
R3 "5k1" RES_0603 18.805,154.86 r270 top
R4 "10K" RES_0603 9.655,155.908 r0 top
R5 "10K" RES_0603 19.561,152.515 r180 bottom
R6 "10K" RES_0603 17.734,161.508 r180 top
R7 "10K" RES_0603 17.734,158.968 r180 top
R8 "10k" RES_0603 38.453,132.191 r0 top
R9 "10k" RES_0603 22.055,138.331 r270 top
R10 "1K" RES_0603 23.325,138.331 r270 top
R11 "0R" RES_0603 21.055,139.008 r90 bottom
R12 "0R" RES_0603 -2.115,144.225 r0 top
R13 "0R" RES_0603 6.055,139.008 r270 bottom
R14 "1K" RES_0603 -14.295,128.408 r0 bottom
R15 "2K" RES_0603 -14.295,127.108 r0 bottom
R16 "4.7K" RES_0603 38.105,70.908 r0 bottom
R17 "4.7K" RES_0603 38.105,69.508 r0 bottom
R18 "2ohm" RES_0603 27.755,72.788 r90 bottom
R19 "4.7K" RES_0603 -23.145,70.858 r0 bottom
R20 "4.7K" RES_0603 -23.145,69.508 r0 bottom
R21 "2ohm" RES_0603 -33.245,72.858 r90 bottom
R22 "1K" RES_0603 -14.205,122.85 r0 bottom
R23 "2K" RES_0603 -14.255,121.55 r0 bottom
R24 "1K" RES_0603 -14.245,119.938 r0 bottom
R25 "2K" RES_0603 -14.245,118.588 r0 bottom
R26 "47K" RES_0603 35.705,119.308 r270 bottom
R27 "10K" RES_0603 34.334,119.312 r270 bottom
R28 "56.2K" RES_0603 33.005,119.308 r90 bottom
R29 "47K" RES_0603 9.855,124.458 r0 bottom
R30 "68k" RES_0603 9.855,125.758 r0 bottom
R31 "56.2K" RES_0603 38.555,123.358 r270 bottom
R32 "47K" RES_0603 38.605,126.058 r270 bottom
R33 "68K" RES_0603 -14.24,125.803 r0 bottom
R34 "47K" RES_0603 -14.24,124.453 r180 bottom
R35 "4k7" RES_0603 22.685,135.297 r180 top
R36 "4k7" RES_0603 22.685,136.513 r180 top
R37 "22R" RES_0603 -26.31,143.73 r270 top
R38 "10k" RES_0603 -34.395,138.058 r180 top
R39 "10k" RES_0603 -34.39,135.47 r180 top
R40 "0" RES_0603 25.359,138.756 r0 top
R41 "140K" RES_0603 49.705,135.808 r270 top
R42 "TC33X-2-103E" BOUR-TC33X-2_V 45.06,135.36 r90 top
R43 "10K" RES_0603 51.055,135.808 r90 top
R44 "140K" RES_0603 40.395,149.025 r46.5 top
R45 "TC33X-2-103E" BOUR-TC33X-2_V 42.525,151.845 r136.5 top
R46 "10K" RES_0603 41.269,148.239 r46.5 top
R47 "10K" RES_0603 -14.495,155.358 r0 top
R48 "10K" RES_0603 -16.486,157.057 r90 top
R49 "10K" RES_0603 -14.495,150.108 r0 top
R50 "10K" RES_0603 -16.462,151.844 r90 top
S1 "SSSS223900" SW-TH_SSSS223900 44.667,158.314 r136.5 top
SW1 "219-2LPST" CTS-219-2LPST_V 9.645,160.219 r180 top
SW2 "RESET" FP-B3U-1000P-MFG -3.205,163.556 r0 top
SW3 "B3U-1000P" FP-B3U-1000P-MFG -8.295,163.556 r0 top
SW4 "RESET" FP-B3U-1000P-MFG -20.395,163.508 r0 top
SW5 "BOOT" FP-B3U-1000P-MFG -15.395,163.508 r0 top
TP1 "TP_NOBOM" PAD_RND_1MM#1 -33.245,74.808 r90 bottom
TP2 "TP_NOBOM" PAD_RND_1MM#1 30.371,144.734 r90 top
TP3 "TP_NOBOM" PAD_RND_1MM#1 -22.187,142.98 r90 top
TP4 "TP_NOBOM" PAD_RND_1MM#1 -22.2,133.265 r90 top
TP5 "TP_NOBOM" PAD_RND_1MM#1 19.705,141.358 r90 top
TP6 "TP_NOBOM" PAD_RND_1MM#1 19.705,136.608 r90 top
TP7 "TP_NOBOM" PAD_RND_1MM#1 27.703,74.931 r90 bottom
TP8 "TP_NOBOM" PAD_RND_1MM#1 -3.609,128.008 r90 bottom
TP9 "TP_NOBOM" PAD_RND_1MM#2 5.822,119.608 r90 bottom
TP10 "TP_NOBOM" PAD_RND_1MM#1 -34.595,72.008 r90 bottom
TP11 "TP_NOBOM" PAD_RND_1MM#1 -0.445,119.608 r90 bottom
TP12 "TP_NOBOM" PAD_RND_1MM#1 26.355,126.108 r90 bottom
TP13 "TP_NOBOM" PAD_RND_1MM#1 7.605,128.008 r90 bottom
TP14 "TP_NOBOM" PAD_RND_1MM#1 7.605,136.408 r90 top
TP15 "TP_NOBOM" PAD_RND_1MM#1 7.605,138.073 r90 top
TP16 "TP_NOBOM" PAD_RND_1MM#1 7.605,139.658 r90 top
U1 "MCP4822T-E_SN" SOIC-8_L4.9-W3.9-P1.27-LS6.0-BL 1.505,154.758 r270 bottom value=MCP4822T-E/SN
U2 "LM324AM/NOPB" D0014A_M 2.035,125.183 r270 bottom
U3 "SPX3819M5-L-3-3/TR" SOT-23-5 9.605,153.508 r180 top
U4 "FSUSB74UMX" UMLP16_1P8X2P6_ONS 17.655,149.908 r180 bottom
U5 "CH446Q" PG-LQFP-44 -32.313,105.733 r180 bottom locked
U6 "CH446Q" PG-LQFP-44 -18.313,105.733 r180 bottom locked
U7 "CH446Q" PG-LQFP-44 23.687,105.748 r180 bottom locked
U8 "CH446Q" PG-LQFP-44 37.687,105.748 r180 bottom locked
U9 "CH446Q" PG-LQFP-44 -32.195,88.008 r180 bottom locked
U10 "CH446Q" PG-LQFP-44 -18.195,88.023 r180 bottom locked
U11 "CH446Q" PG-LQFP-44 23.805,88.023 r180 bottom locked
U12 "CH446Q" PG-LQFP-44 37.805,88.023 r180 bottom locked
U13 "RP2040" IC57_RP2040 31.857,135.735 r0 top
U14 "W25Q128JVSIM" SOIC-8 26.73,145.11 r270 top
U15 "CAT24C256WI-G" ONSC-SOIC-8-751BD-01_L 24.758,128.992 r180 top
U16 "ESP32-S3FN8" QFN56_7X7_EXP -27.404,136.718 r0 top
U17 "LT1054IP" P0008A 1.217,138.701 r90 top
U18 "LM324AM/NOPB" D0014A_M -27.945,125.158 r270 bottom
U19 "INA219AIDR" D0008A_L 32.655,71.458 r180 bottom
U20 "INA219AIDR" D0008A_L -28.595,71.458 r180 bottom
U21 "L272D" FP-SO16_Narrow-0016020-IPC_C 32.305,124.608 r270 bottom
U22 "W25Q128JVSIM" SOIC-8 -18.445,138.327 r270 top
U23 "CH446Q" PG-LQFP-44 -4.313,105.748 r180 bottom locked
U24 "CH446Q" PG-LQFP-44 -4.195,88.023 r180 bottom locked
U25 "CH446Q" PG-LQFP-44 9.79,88.008 r180 bottom locked
U26 "CH446Q" PG-LQFP-44 9.687,105.748 r180 bottom locked
U27 "LM2660MX/NOPB" D0008A_M 1.405,138.708 r0 top
U29 "SN74LVC1G3157DBVR" FP-DBV0006A-IPC_C -8.945,157.908 r0 top
U30 "SN74LVC1G3157DBVR" FP-DBV0006A-IPC_C -8.945,152.608 r0 top
U31 "ABX00053" MODULE_ABX00053 1.471,138.447 r180 top locked
X1 "12MHz" XTAL_3225 31.596,128.562 r180 top
X2 "40Mhz" XTAL_3225 -27.225,147.285 r180 top

## Footprints (in the part's own frame and the unit in brackets; to place one, negate y for a bottom-side part, rotate by r counter-clockwise, add the part's x,y. Pads: shape width x height; smd on the part's side, far side on the other; paste and mask are expansions set on the pad)
ANT_IFA_USB_2_4GHZ_50R [mm]
  rect 5x0.5 smd paste-2539.97 mask+0.102: 1(2.05,5.15)
  rect 0.5x4.9 smd paste-2539.97 mask+0.102: 1(2.1,2.45)
  rect 0.5x2.64 smd paste-2539.97 mask+0.102: 1(4.3,3.58) 1(6.8,3.58) 1(9,3.58) 1(11.5,3.58)
  rect 2x0.5 smd paste-2539.97 mask+0.102: 1(5.55,2.51) 1(10.25,2.51)
  rect 2.7x0.5 smd paste-2539.97 mask+0.102: 1(7.9,5.15) 1(12.6,5.15)
  rect 0.5x3.94 smd paste-2539.97 mask+0.102: 1(13.7,2.93)
  rect 0.9x4.9 smd paste-2539.97 mask+0.102: 2(0,2.45)
ASPI-4030S [mm]
  rrect10% 1.1x3.4 smd: 1(-1.5,0) 2(1.5,0)
  silkscreen extent -0.5,-1.6 0.5,1.6, body extent -2,-2 2,2, height 3.01
BOUR-TC33X-2_V [mm] "SMD, 3-Leads, Body 3.8x3.6mm"
  rect 1.2x1.2 smd: 1(-1.8,1) 3(-1.8,-1)
  rect 1.5x1.6 smd: 2(1.45,0)
  silkscreen extent -3.07,-1.8 1.8,1.8, body extent -2,-1.8 1.96,1.8, height 1.15